# EAGLE board RedBot Accelerometer-Panel-v11 (EAGLE 6.5.0), part 1 of 3
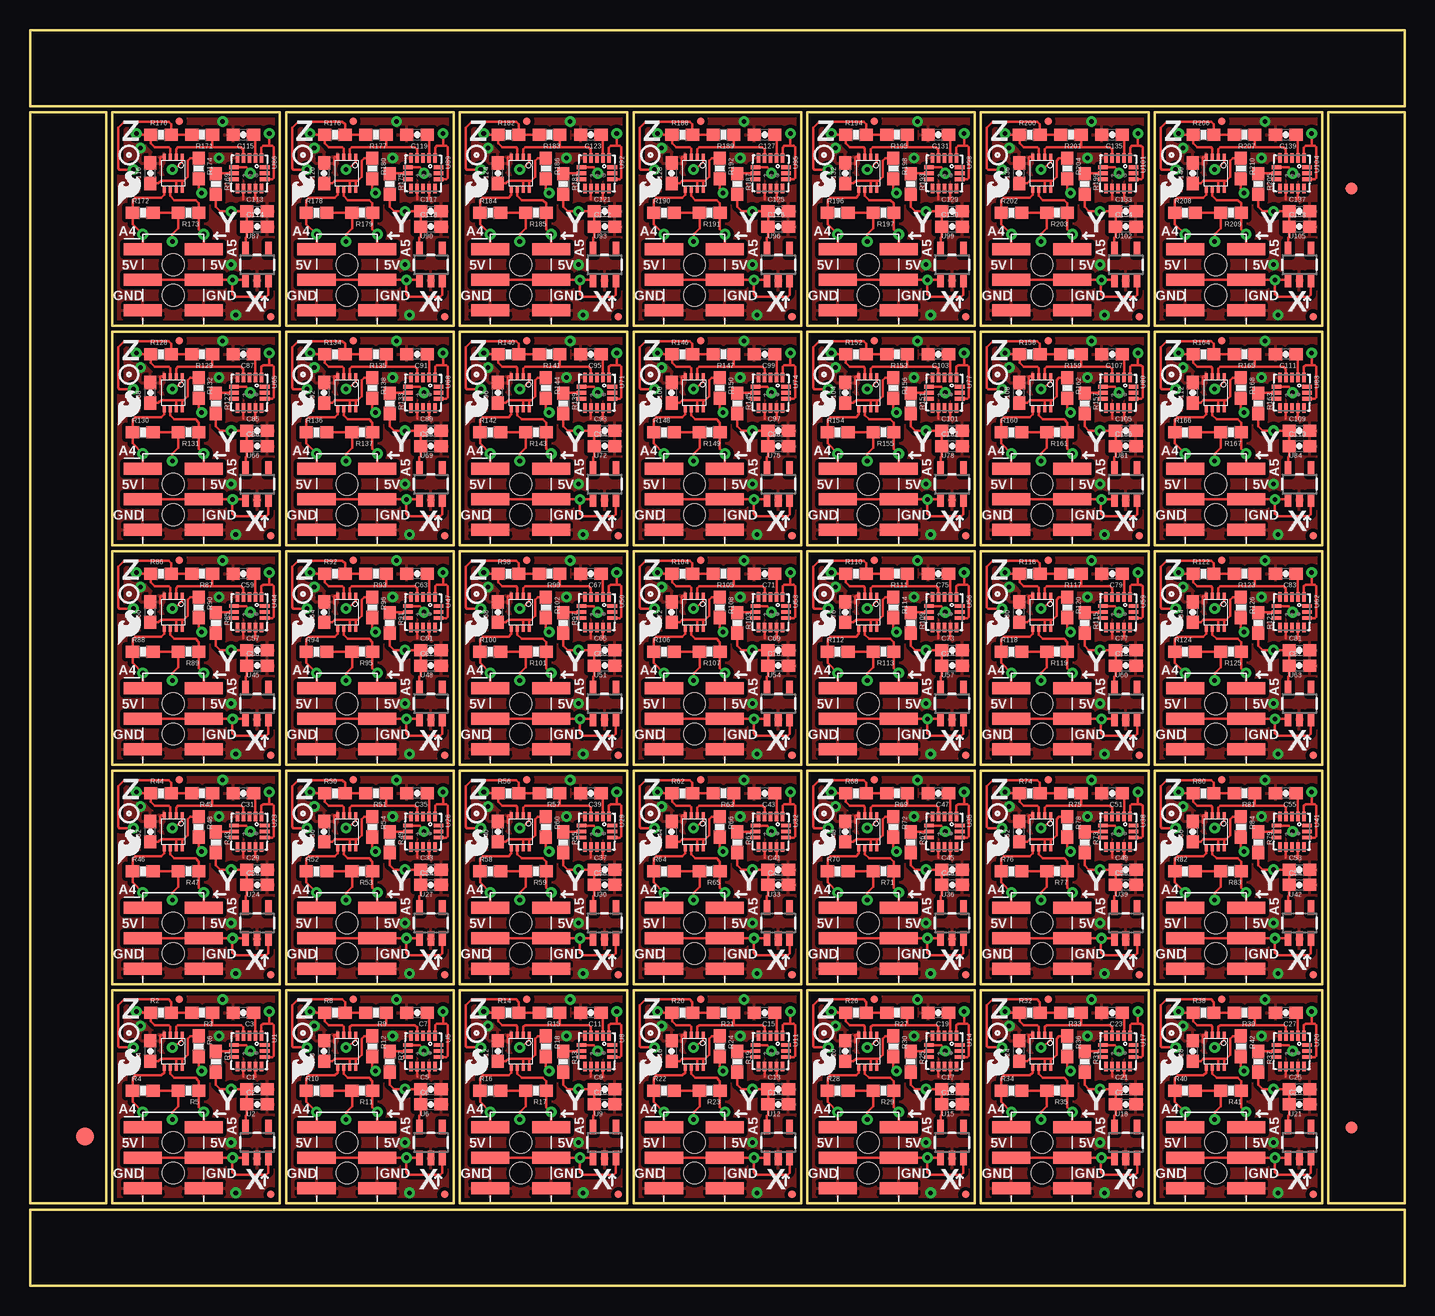
[diagram p0: board, top side]
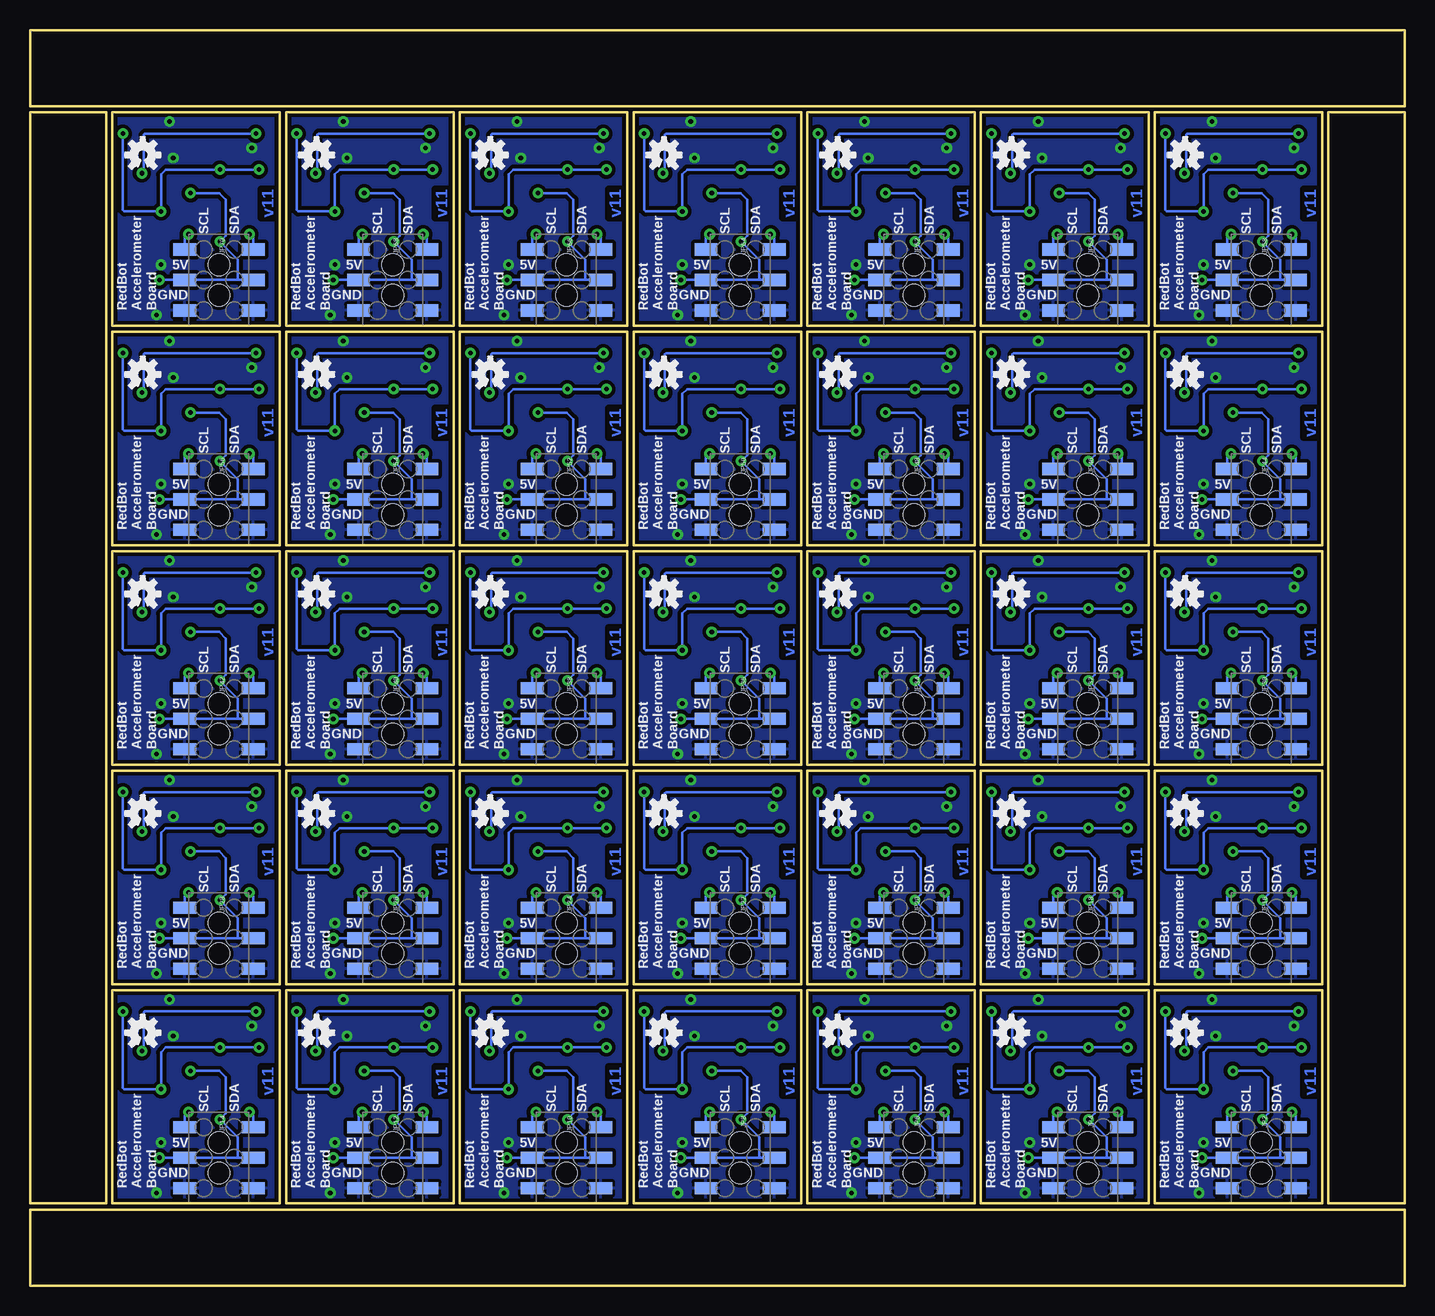
[diagram p1: board, bottom side, seen from below]

Size 114.55 x 104.65 mm. Coordinates in mm from the lower left corner, seen from the top.
Outline: 6.35,79.25 6.35,6.86 0,6.86 0,29.72
Outline: 114.55,79.25 114.55,6.86 108.2,6.86 108.2,29.72
Outline: 108.2,25.4 108.2,97.79 114.55,97.79 114.55,74.93
Outline: 0,25.4 0,97.79 6.35,97.79 6.35,74.93
Outline: 6.86,6.86 6.86,24.64 20.83,24.64 20.83,6.86 6.86,6.86
Outline: 21.34,6.86 21.34,24.64 35.31,24.64 35.31,6.86 21.34,6.86
Outline: 35.81,6.86 35.81,24.64 49.78,24.64 49.78,6.86 35.81,6.86
Outline: 50.29,6.86 50.29,24.64 64.26,24.64 64.26,6.86 50.29,6.86
Outline: 64.77,6.86 64.77,24.64 78.74,24.64 78.74,6.86 64.77,6.86
Outline: 79.25,6.86 79.25,24.64 93.22,24.64 93.22,6.86 79.25,6.86
Outline: 93.73,6.86 93.73,24.64 107.7,24.64 107.7,6.86 93.73,6.86
Outline: 6.86,25.15 6.86,42.93 20.83,42.93 20.83,25.15 6.86,25.15
Outline: 21.34,25.15 21.34,42.93 35.31,42.93 35.31,25.15 21.34,25.15
Outline: 35.81,25.15 35.81,42.93 49.78,42.93 49.78,25.15 35.81,25.15
Outline: 50.29,25.15 50.29,42.93 64.26,42.93 64.26,25.15 50.29,25.15
Outline: 64.77,25.15 64.77,42.93 78.74,42.93 78.74,25.15 64.77,25.15
Outline: 79.25,25.15 79.25,42.93 93.22,42.93 93.22,25.15 79.25,25.15
Outline: 93.73,25.15 93.73,42.93 107.7,42.93 107.7,25.15 93.73,25.15
Outline: 6.86,43.43 6.86,61.21 20.83,61.21 20.83,43.43 6.86,43.43
Outline: 21.34,43.43 21.34,61.21 35.31,61.21 35.31,43.43 21.34,43.43
Outline: 35.81,43.43 35.81,61.21 49.78,61.21 49.78,43.43 35.81,43.43
Outline: 50.29,43.43 50.29,61.21 64.26,61.21 64.26,43.43 50.29,43.43
Outline: 64.77,43.43 64.77,61.21 78.74,61.21 78.74,43.43 64.77,43.43
Outline: 79.25,43.43 79.25,61.21 93.22,61.21 93.22,43.43 79.25,43.43
Outline: 93.73,43.43 93.73,61.21 107.7,61.21 107.7,43.43 93.73,43.43
Outline: 6.86,61.72 6.86,79.5 20.83,79.5 20.83,61.72 6.86,61.72
Outline: 21.34,61.72 21.34,79.5 35.31,79.5 35.31,61.72 21.34,61.72
Outline: 35.81,61.72 35.81,79.5 49.78,79.5 49.78,61.72 35.81,61.72
Outline: 50.29,61.72 50.29,79.5 64.26,79.5 64.26,61.72 50.29,61.72
Outline: 64.77,61.72 64.77,79.5 78.74,79.5 78.74,61.72 64.77,61.72
Outline: 79.25,61.72 79.25,79.5 93.22,79.5 93.22,61.72 79.25,61.72
Outline: 93.73,61.72 93.73,79.5 107.7,79.5 107.7,61.72 93.73,61.72
Outline: 6.86,80.01 6.86,97.79 20.83,97.79 20.83,80.01 6.86,80.01
Outline: 21.34,80.01 21.34,97.79 35.31,97.79 35.31,80.01 21.34,80.01
Outline: 35.81,80.01 35.81,97.79 49.78,97.79 49.78,80.01 35.81,80.01
Outline: 50.29,80.01 50.29,97.79 64.26,97.79 64.26,80.01 50.29,80.01
Outline: 64.77,80.01 64.77,97.79 78.74,97.79 78.74,80.01 64.77,80.01
Outline: 79.25,80.01 79.25,97.79 93.22,97.79 93.22,80.01 79.25,80.01
Outline: 93.73,80.01 93.73,97.79 107.7,97.79 107.7,80.01 93.73,80.01
Outline: 0,0 114.55,0 114.55,6.35 0,6.35 0,0
Outline: 114.55,104.65 0,104.65 0,98.3 114.55,98.3 114.55,104.65
Copper layers (1*16): Top 0.035mm / dielectric 1.5mm / Bottom 0.035mm
Design rules "Sparkfun": minimum track width 8mil, minimum drill 20mil, track to track 8mil, track to pad 8mil, pad to pad 8mil, via to via 8mil, smd to smd 8mil, copper to edge 8mil, drill to drill 8mil, minimum pad ring 12mil, minimum via ring 10mil, stop-mask expansion 4mil, vias tented up to drill 20mil, thermal gap 10mil

## Footprints (pad centres in the part's own frame; a part is rotated, then mirrored left to right if it is on the bottom)
0603-CAP = smd 1.1 x 1: 1 -0.85,0; 2 0.85,0
FIDUCIAL-1.5X3 = smd 1.5 x 1.5: 1 0,0
FIDUCIAL-1X2 = smd 1 x 1: 1 0,0
MICRO-FIDUCIAL = smd 0.635 x 0.635: 1 0,0
2X3_SMT_POSTS = smd 1 x 3.17: 1 -2.54,-2.54; 2 -2.54,2.54; 3 0,-2.54; 4 0,2.54; 5 2.54,-2.54; 6 2.54,2.54 | hole 1.8: -1.27,0; 1.27,0
2X3_SMD = smd 1.02 x 1.9: 1 -2.54,-2.85; 2 -2.54,2.85; 3 0,-2.85; 4 0,2.85; 5 2.54,-2.85; 6 2.54,2.85
0603-RES = smd 1.1 x 1: 1 -0.85,0; 2 0.85,0
QFN-16_0.5MM = smd 0.8 x 0.3: 1 -1.275,1; 2 -1.275,0.5; 3 -1.275,0; 4 -1.275,-0.5; 5 -1.275,-1; 9 1.275,-1; 10 1.275,-0.5; 11 1.275,0; 12 1.275,0.5; 13 1.275,1 | smd 0.3 x 0.8: 6 -0.5,-1.275; 7 0,-1.275; 8 0.5,-1.275; 14 0.5,1.275; 15 0,1.275; 16 -0.5,1.275
SOT23-5 = smd 0.55 x 1.2: 1 -0.95,-1.3; 2 0,-1.3; 3 0.95,-1.3; 4 0.95,1.3; 5 -0.95,1.3
PSOP-8 = smd 0.25 x 0.5: 1 -0.73,-1.37; 2 -0.23,-1.37; 3 0.27,-1.37; 4 0.77,-1.37; 5 0.77,1.38; 6 0.27,1.38; 7 -0.23,1.38; 8 -0.73,1.38

## Placement (x,y rotation side)
C1  0.1uF  [0603-CAP]  18.92,16.38 0 top
C2  4.7uF  [0603-CAP]  18.92,15.11 0 top
C3  0.1uF  [0603-CAP]  17.78,22.76 180 top
C4  0.1uF  [0603-CAP]  10.03,19.56 90 top
C5  0.1uF  [0603-CAP]  33.4,16.38 0 top
C6  4.7uF  [0603-CAP]  33.4,15.11 0 top
C7  0.1uF  [0603-CAP]  32.26,22.76 180 top
C8  0.1uF  [0603-CAP]  24.51,19.56 90 top
C9  0.1uF  [0603-CAP]  47.88,16.38 0 top
C10  4.7uF  [0603-CAP]  47.88,15.11 0 top
C11  0.1uF  [0603-CAP]  46.74,22.76 180 top
C12  0.1uF  [0603-CAP]  38.99,19.56 90 top
C13  0.1uF  [0603-CAP]  62.36,16.38 0 top
C14  4.7uF  [0603-CAP]  62.36,15.11 0 top
C15  0.1uF  [0603-CAP]  61.21,22.76 180 top
C16  0.1uF  [0603-CAP]  53.47,19.56 90 top
C17  0.1uF  [0603-CAP]  76.83,16.38 0 top
C18  4.7uF  [0603-CAP]  76.83,15.11 0 top
C19  0.1uF  [0603-CAP]  75.69,22.76 180 top
C20  0.1uF  [0603-CAP]  67.94,19.56 90 top
C21  0.1uF  [0603-CAP]  91.31,16.38 0 top
C22  4.7uF  [0603-CAP]  91.31,15.11 0 top
C23  0.1uF  [0603-CAP]  90.17,22.76 180 top
C24  0.1uF  [0603-CAP]  82.42,19.56 90 top
C25  0.1uF  [0603-CAP]  105.79,16.38 0 top
C26  4.7uF  [0603-CAP]  105.79,15.11 0 top
C27  0.1uF  [0603-CAP]  104.65,22.76 180 top
C28  0.1uF  [0603-CAP]  96.9,19.56 90 top
C29  0.1uF  [0603-CAP]  18.92,34.67 0 top
C30  4.7uF  [0603-CAP]  18.92,33.4 0 top
C31  0.1uF  [0603-CAP]  17.78,41.05 180 top
C32  0.1uF  [0603-CAP]  10.03,37.85 90 top
C33  0.1uF  [0603-CAP]  33.4,34.67 0 top
C34  4.7uF  [0603-CAP]  33.4,33.4 0 top
C35  0.1uF  [0603-CAP]  32.26,41.05 180 top
C36  0.1uF  [0603-CAP]  24.51,37.85 90 top
C37  0.1uF  [0603-CAP]  47.88,34.67 0 top
C38  4.7uF  [0603-CAP]  47.88,33.4 0 top
C39  0.1uF  [0603-CAP]  46.74,41.05 180 top
C40  0.1uF  [0603-CAP]  38.99,37.85 90 top
C41  0.1uF  [0603-CAP]  62.36,34.67 0 top
C42  4.7uF  [0603-CAP]  62.36,33.4 0 top
C43  0.1uF  [0603-CAP]  61.21,41.05 180 top
C44  0.1uF  [0603-CAP]  53.47,37.85 90 top
C45  0.1uF  [0603-CAP]  76.83,34.67 0 top
C46  4.7uF  [0603-CAP]  76.83,33.4 0 top
C47  0.1uF  [0603-CAP]  75.69,41.05 180 top
C48  0.1uF  [0603-CAP]  67.94,37.85 90 top
C49  0.1uF  [0603-CAP]  91.31,34.67 0 top
C50  4.7uF  [0603-CAP]  91.31,33.4 0 top
C51  0.1uF  [0603-CAP]  90.17,41.05 180 top
C52  0.1uF  [0603-CAP]  82.42,37.85 90 top
C53  0.1uF  [0603-CAP]  105.79,34.67 0 top
C54  4.7uF  [0603-CAP]  105.79,33.4 0 top
C55  0.1uF  [0603-CAP]  104.65,41.05 180 top
C56  0.1uF  [0603-CAP]  96.9,37.85 90 top
C57  0.1uF  [0603-CAP]  18.92,52.96 0 top
C58  4.7uF  [0603-CAP]  18.92,51.69 0 top
C59  0.1uF  [0603-CAP]  17.78,59.34 180 top
C60  0.1uF  [0603-CAP]  10.03,56.13 90 top
C61  0.1uF  [0603-CAP]  33.4,52.96 0 top
C62  4.7uF  [0603-CAP]  33.4,51.69 0 top
C63  0.1uF  [0603-CAP]  32.26,59.34 180 top
C64  0.1uF  [0603-CAP]  24.51,56.13 90 top
C65  0.1uF  [0603-CAP]  47.88,52.96 0 top
C66  4.7uF  [0603-CAP]  47.88,51.69 0 top
C67  0.1uF  [0603-CAP]  46.74,59.34 180 top
C68  0.1uF  [0603-CAP]  38.99,56.13 90 top
C69  0.1uF  [0603-CAP]  62.36,52.96 0 top
C70  4.7uF  [0603-CAP]  62.36,51.69 0 top
C71  0.1uF  [0603-CAP]  61.21,59.34 180 top
C72  0.1uF  [0603-CAP]  53.47,56.13 90 top
C73  0.1uF  [0603-CAP]  76.83,52.96 0 top
C74  4.7uF  [0603-CAP]  76.83,51.69 0 top
C75  0.1uF  [0603-CAP]  75.69,59.34 180 top
C76  0.1uF  [0603-CAP]  67.94,56.13 90 top
C77  0.1uF  [0603-CAP]  91.31,52.96 0 top
C78  4.7uF  [0603-CAP]  91.31,51.69 0 top
C79  0.1uF  [0603-CAP]  90.17,59.34 180 top
C80  0.1uF  [0603-CAP]  82.42,56.13 90 top
C81  0.1uF  [0603-CAP]  105.79,52.96 0 top
C82  4.7uF  [0603-CAP]  105.79,51.69 0 top
C83  0.1uF  [0603-CAP]  104.65,59.34 180 top
C84  0.1uF  [0603-CAP]  96.9,56.13 90 top
C85  0.1uF  [0603-CAP]  18.92,71.25 0 top
C86  4.7uF  [0603-CAP]  18.92,69.98 0 top
C87  0.1uF  [0603-CAP]  17.78,77.62 180 top
C88  0.1uF  [0603-CAP]  10.03,74.42 90 top
C89  0.1uF  [0603-CAP]  33.4,71.25 0 top
C90  4.7uF  [0603-CAP]  33.4,69.98 0 top
C91  0.1uF  [0603-CAP]  32.26,77.62 180 top
C92  0.1uF  [0603-CAP]  24.51,74.42 90 top
C93  0.1uF  [0603-CAP]  47.88,71.25 0 top
C94  4.7uF  [0603-CAP]  47.88,69.98 0 top
C95  0.1uF  [0603-CAP]  46.74,77.62 180 top
C96  0.1uF  [0603-CAP]  38.99,74.42 90 top
C97  0.1uF  [0603-CAP]  62.36,71.25 0 top
C98  4.7uF  [0603-CAP]  62.36,69.98 0 top
C99  0.1uF  [0603-CAP]  61.21,77.62 180 top
C100  0.1uF  [0603-CAP]  53.47,74.42 90 top
C101  0.1uF  [0603-CAP]  76.83,71.25 0 top
C102  4.7uF  [0603-CAP]  76.83,69.98 0 top
C103  0.1uF  [0603-CAP]  75.69,77.62 180 top
C104  0.1uF  [0603-CAP]  67.94,74.42 90 top
C105  0.1uF  [0603-CAP]  91.31,71.25 0 top
C106  4.7uF  [0603-CAP]  91.31,69.98 0 top
C107  0.1uF  [0603-CAP]  90.17,77.62 180 top
C108  0.1uF  [0603-CAP]  82.42,74.42 90 top
C109  0.1uF  [0603-CAP]  105.79,71.25 0 top
C110  4.7uF  [0603-CAP]  105.79,69.98 0 top
C111  0.1uF  [0603-CAP]  104.65,77.62 180 top
C112  0.1uF  [0603-CAP]  96.9,74.42 90 top
C113  0.1uF  [0603-CAP]  18.92,89.53 0 top
C114  4.7uF  [0603-CAP]  18.92,88.27 0 top
C115  0.1uF  [0603-CAP]  17.78,95.91 180 top
C116  0.1uF  [0603-CAP]  10.03,92.71 90 top
C117  0.1uF  [0603-CAP]  33.4,89.53 0 top
C118  4.7uF  [0603-CAP]  33.4,88.27 0 top
C119  0.1uF  [0603-CAP]  32.26,95.91 180 top
C120  0.1uF  [0603-CAP]  24.51,92.71 90 top
C121  0.1uF  [0603-CAP]  47.88,89.53 0 top
C122  4.7uF  [0603-CAP]  47.88,88.27 0 top
C123  0.1uF  [0603-CAP]  46.74,95.91 180 top
C124  0.1uF  [0603-CAP]  38.99,92.71 90 top
C125  0.1uF  [0603-CAP]  62.36,89.53 0 top
C126  4.7uF  [0603-CAP]  62.36,88.27 0 top
C127  0.1uF  [0603-CAP]  61.21,95.91 180 top
C128  0.1uF  [0603-CAP]  53.47,92.71 90 top
C129  0.1uF  [0603-CAP]  76.83,89.53 0 top
C130  4.7uF  [0603-CAP]  76.83,88.27 0 top
C131  0.1uF  [0603-CAP]  75.69,95.91 180 top
C132  0.1uF  [0603-CAP]  67.94,92.71 90 top
C133  0.1uF  [0603-CAP]  91.31,89.53 0 top
C134  4.7uF  [0603-CAP]  91.31,88.27 0 top
C135  0.1uF  [0603-CAP]  90.17,95.91 180 top
C136  0.1uF  [0603-CAP]  82.42,92.71 90 top
C137  0.1uF  [0603-CAP]  105.79,89.53 0 top
C138  4.7uF  [0603-CAP]  105.79,88.27 0 top
C139  0.1uF  [0603-CAP]  104.65,95.91 180 top
C140  0.1uF  [0603-CAP]  96.9,92.71 90 top
E$1  [FIDUCIAL-1.5X3]  4.57,12.45 0 top
E$4  [FIDUCIAL-1X2]  110.11,13.21 0 top
E$5  [FIDUCIAL-1X2]  110.11,91.44 180 top
FID1  FIDUCIALUFIDUCIAL  [MICRO-FIDUCIAL]  20.07,7.62 0 top
FID2  FIDUCIALUFIDUCIAL  [MICRO-FIDUCIAL]  12.45,23.88 0 top
FID3  FIDUCIALUFIDUCIAL  [MICRO-FIDUCIAL]  34.54,7.62 0 top
FID4  FIDUCIALUFIDUCIAL  [MICRO-FIDUCIAL]  26.92,23.88 0 top
FID5  FIDUCIALUFIDUCIAL  [MICRO-FIDUCIAL]  49.02,7.62 0 top
FID6  FIDUCIALUFIDUCIAL  [MICRO-FIDUCIAL]  41.4,23.88 0 top
FID7  FIDUCIALUFIDUCIAL  [MICRO-FIDUCIAL]  63.5,7.62 0 top
FID8  FIDUCIALUFIDUCIAL  [MICRO-FIDUCIAL]  55.88,23.88 0 top
FID9  FIDUCIALUFIDUCIAL  [MICRO-FIDUCIAL]  77.98,7.62 0 top
FID10  FIDUCIALUFIDUCIAL  [MICRO-FIDUCIAL]  70.36,23.88 0 top
FID11  FIDUCIALUFIDUCIAL  [MICRO-FIDUCIAL]  92.46,7.62 0 top
FID12  FIDUCIALUFIDUCIAL  [MICRO-FIDUCIAL]  84.84,23.88 0 top
FID13  FIDUCIALUFIDUCIAL  [MICRO-FIDUCIAL]  106.93,7.62 0 top
FID14  FIDUCIALUFIDUCIAL  [MICRO-FIDUCIAL]  99.31,23.88 0 top
FID15  FIDUCIALUFIDUCIAL  [MICRO-FIDUCIAL]  20.07,25.91 0 top
FID16  FIDUCIALUFIDUCIAL  [MICRO-FIDUCIAL]  12.45,42.16 0 top
FID17  FIDUCIALUFIDUCIAL  [MICRO-FIDUCIAL]  34.54,25.91 0 top
FID18  FIDUCIALUFIDUCIAL  [MICRO-FIDUCIAL]  26.92,42.16 0 top
FID19  FIDUCIALUFIDUCIAL  [MICRO-FIDUCIAL]  49.02,25.91 0 top
FID20  FIDUCIALUFIDUCIAL  [MICRO-FIDUCIAL]  41.4,42.16 0 top
FID21  FIDUCIALUFIDUCIAL  [MICRO-FIDUCIAL]  63.5,25.91 0 top
FID22  FIDUCIALUFIDUCIAL  [MICRO-FIDUCIAL]  55.88,42.16 0 top
FID23  FIDUCIALUFIDUCIAL  [MICRO-FIDUCIAL]  77.98,25.91 0 top
FID24  FIDUCIALUFIDUCIAL  [MICRO-FIDUCIAL]  70.36,42.16 0 top
FID25  FIDUCIALUFIDUCIAL  [MICRO-FIDUCIAL]  92.46,25.91 0 top
FID26  FIDUCIALUFIDUCIAL  [MICRO-FIDUCIAL]  84.84,42.16 0 top
FID27  FIDUCIALUFIDUCIAL  [MICRO-FIDUCIAL]  106.93,25.91 0 top
FID28  FIDUCIALUFIDUCIAL  [MICRO-FIDUCIAL]  99.31,42.16 0 top
FID29  FIDUCIALUFIDUCIAL  [MICRO-FIDUCIAL]  20.07,44.2 0 top
FID30  FIDUCIALUFIDUCIAL  [MICRO-FIDUCIAL]  12.45,60.45 0 top
FID31  FIDUCIALUFIDUCIAL  [MICRO-FIDUCIAL]  34.54,44.2 0 top
FID32  FIDUCIALUFIDUCIAL  [MICRO-FIDUCIAL]  26.92,60.45 0 top
FID33  FIDUCIALUFIDUCIAL  [MICRO-FIDUCIAL]  49.02,44.2 0 top
FID34  FIDUCIALUFIDUCIAL  [MICRO-FIDUCIAL]  41.4,60.45 0 top
FID35  FIDUCIALUFIDUCIAL  [MICRO-FIDUCIAL]  63.5,44.2 0 top
FID36  FIDUCIALUFIDUCIAL  [MICRO-FIDUCIAL]  55.88,60.45 0 top
FID37  FIDUCIALUFIDUCIAL  [MICRO-FIDUCIAL]  77.98,44.2 0 top
FID38  FIDUCIALUFIDUCIAL  [MICRO-FIDUCIAL]  70.36,60.45 0 top
FID39  FIDUCIALUFIDUCIAL  [MICRO-FIDUCIAL]  92.46,44.2 0 top
FID40  FIDUCIALUFIDUCIAL  [MICRO-FIDUCIAL]  84.84,60.45 0 top
FID41  FIDUCIALUFIDUCIAL  [MICRO-FIDUCIAL]  106.93,44.2 0 top
FID42  FIDUCIALUFIDUCIAL  [MICRO-FIDUCIAL]  99.31,60.45 0 top
FID43  FIDUCIALUFIDUCIAL  [MICRO-FIDUCIAL]  20.07,62.48 0 top
FID44  FIDUCIALUFIDUCIAL  [MICRO-FIDUCIAL]  12.45,78.74 0 top
FID45  FIDUCIALUFIDUCIAL  [MICRO-FIDUCIAL]  34.54,62.48 0 top
FID46  FIDUCIALUFIDUCIAL  [MICRO-FIDUCIAL]  26.92,78.74 0 top
FID47  FIDUCIALUFIDUCIAL  [MICRO-FIDUCIAL]  49.02,62.48 0 top
FID48  FIDUCIALUFIDUCIAL  [MICRO-FIDUCIAL]  41.4,78.74 0 top
FID49  FIDUCIALUFIDUCIAL  [MICRO-FIDUCIAL]  63.5,62.48 0 top
FID50  FIDUCIALUFIDUCIAL  [MICRO-FIDUCIAL]  55.88,78.74 0 top
FID51  FIDUCIALUFIDUCIAL  [MICRO-FIDUCIAL]  77.98,62.48 0 top
FID52  FIDUCIALUFIDUCIAL  [MICRO-FIDUCIAL]  70.36,78.74 0 top
FID53  FIDUCIALUFIDUCIAL  [MICRO-FIDUCIAL]  92.46,62.48 0 top
FID54  FIDUCIALUFIDUCIAL  [MICRO-FIDUCIAL]  84.84,78.74 0 top
FID55  FIDUCIALUFIDUCIAL  [MICRO-FIDUCIAL]  106.93,62.48 0 top
FID56  FIDUCIALUFIDUCIAL  [MICRO-FIDUCIAL]  99.31,78.74 0 top
FID57  FIDUCIALUFIDUCIAL  [MICRO-FIDUCIAL]  20.07,80.77 0 top
FID58  FIDUCIALUFIDUCIAL  [MICRO-FIDUCIAL]  12.45,97.03 0 top
FID59  FIDUCIALUFIDUCIAL  [MICRO-FIDUCIAL]  34.54,80.77 0 top
FID60  FIDUCIALUFIDUCIAL  [MICRO-FIDUCIAL]  26.92,97.03 0 top
FID61  FIDUCIALUFIDUCIAL  [MICRO-FIDUCIAL]  49.02,80.77 0 top
FID62  FIDUCIALUFIDUCIAL  [MICRO-FIDUCIAL]  41.4,97.03 0 top
FID63  FIDUCIALUFIDUCIAL  [MICRO-FIDUCIAL]  63.5,80.77 0 top
FID64  FIDUCIALUFIDUCIAL  [MICRO-FIDUCIAL]  55.88,97.03 0 top
FID65  FIDUCIALUFIDUCIAL  [MICRO-FIDUCIAL]  77.98,80.77 0 top
FID66  FIDUCIALUFIDUCIAL  [MICRO-FIDUCIAL]  70.36,97.03 0 top
FID67  FIDUCIALUFIDUCIAL  [MICRO-FIDUCIAL]  92.46,80.77 0 top
FID68  FIDUCIALUFIDUCIAL  [MICRO-FIDUCIAL]  84.84,97.03 0 top
FID69  FIDUCIALUFIDUCIAL  [MICRO-FIDUCIAL]  106.93,80.77 0 top
FID70  FIDUCIALUFIDUCIAL  [MICRO-FIDUCIAL]  99.31,97.03 0 top
JP1  [2X3_SMT_POSTS]  11.94,10.67 270 top
JP2  [2X3_SMD]  11.94,10.67 270 bottom
JP3  [2X3_SMT_POSTS]  26.42,10.67 270 top
JP4  [2X3_SMD]  26.42,10.67 270 bottom
JP5  [2X3_SMT_POSTS]  40.89,10.67 270 top
JP6  [2X3_SMD]  40.89,10.67 270 bottom
JP7  [2X3_SMT_POSTS]  55.37,10.67 270 top
JP8  [2X3_SMD]  55.37,10.67 270 bottom
JP9  [2X3_SMT_POSTS]  69.85,10.67 270 top
JP10  [2X3_SMD]  69.85,10.67 270 bottom
JP11  [2X3_SMT_POSTS]  84.33,10.67 270 top
JP12  [2X3_SMD]  84.33,10.67 270 bottom
JP13  [2X3_SMT_POSTS]  98.81,10.67 270 top
JP14  [2X3_SMD]  98.81,10.67 270 bottom
JP15  [2X3_SMT_POSTS]  11.94,28.96 270 top
JP16  [2X3_SMD]  11.94,28.96 270 bottom
JP17  [2X3_SMT_POSTS]  26.42,28.96 270 top
JP18  [2X3_SMD]  26.42,28.96 270 bottom
JP19  [2X3_SMT_POSTS]  40.89,28.96 270 top
JP20  [2X3_SMD]  40.89,28.96 270 bottom
JP21  [2X3_SMT_POSTS]  55.37,28.96 270 top
JP22  [2X3_SMD]  55.37,28.96 270 bottom
JP23  [2X3_SMT_POSTS]  69.85,28.96 270 top
JP24  [2X3_SMD]  69.85,28.96 270 bottom
JP25  [2X3_SMT_POSTS]  84.33,28.96 270 top
JP26  [2X3_SMD]  84.33,28.96 270 bottom
JP27  [2X3_SMT_POSTS]  98.81,28.96 270 top
JP28  [2X3_SMD]  98.81,28.96 270 bottom
JP29  [2X3_SMT_POSTS]  11.94,47.24 270 top
JP30  [2X3_SMD]  11.94,47.24 270 bottom
JP31  [2X3_SMT_POSTS]  26.42,47.24 270 top
JP32  [2X3_SMD]  26.42,47.24 270 bottom
JP33  [2X3_SMT_POSTS]  40.89,47.24 270 top
JP34  [2X3_SMD]  40.89,47.24 270 bottom
JP35  [2X3_SMT_POSTS]  55.37,47.24 270 top
JP36  [2X3_SMD]  55.37,47.24 270 bottom
JP37  [2X3_SMT_POSTS]  69.85,47.24 270 top
JP38  [2X3_SMD]  69.85,47.24 270 bottom
JP39  [2X3_SMT_POSTS]  84.33,47.24 270 top
JP40  [2X3_SMD]  84.33,47.24 270 bottom
JP41  [2X3_SMT_POSTS]  98.81,47.24 270 top
JP42  [2X3_SMD]  98.81,47.24 270 bottom
JP43  [2X3_SMT_POSTS]  11.94,65.53 270 top
JP44  [2X3_SMD]  11.94,65.53 270 bottom
JP45  [2X3_SMT_POSTS]  26.42,65.53 270 top
JP46  [2X3_SMD]  26.42,65.53 270 bottom
JP47  [2X3_SMT_POSTS]  40.89,65.53 270 top
JP48  [2X3_SMD]  40.89,65.53 270 bottom
JP49  [2X3_SMT_POSTS]  55.37,65.53 270 top
JP50  [2X3_SMD]  55.37,65.53 270 bottom
JP51  [2X3_SMT_POSTS]  69.85,65.53 270 top
JP52  [2X3_SMD]  69.85,65.53 270 bottom
JP53  [2X3_SMT_POSTS]  84.33,65.53 270 top
JP54  [2X3_SMD]  84.33,65.53 270 bottom
JP55  [2X3_SMT_POSTS]  98.81,65.53 270 top
JP56  [2X3_SMD]  98.81,65.53 270 bottom
JP57  [2X3_SMT_POSTS]  11.94,83.82 270 top
JP58  [2X3_SMD]  11.94,83.82 270 bottom
JP59  [2X3_SMT_POSTS]  26.42,83.82 270 top
JP60  [2X3_SMD]  26.42,83.82 270 bottom
JP61  [2X3_SMT_POSTS]  40.89,83.82 270 top
JP62  [2X3_SMD]  40.89,83.82 270 bottom
JP63  [2X3_SMT_POSTS]  55.37,83.82 270 top
JP64  [2X3_SMD]  55.37,83.82 270 bottom
JP65  [2X3_SMT_POSTS]  69.85,83.82 270 top
JP66  [2X3_SMD]  69.85,83.82 270 bottom
JP67  [2X3_SMT_POSTS]  84.33,83.82 270 top
JP68  [2X3_SMD]  84.33,83.82 270 bottom
JP69  [2X3_SMT_POSTS]  98.81,83.82 270 top
JP70  [2X3_SMD]  98.81,83.82 270 bottom
LOGO1  LOGO-SFESK  [SFE-LOGO-FLAME]  7.37,16.89 0 top
LOGO2  OSHW-LOGOS  [OSHW-LOGO-S]  18.29,21.08 0 bottom
LOGO3  LOGO-SFESK  [SFE-LOGO-FLAME]  21.84,16.89 0 top
LOGO4  OSHW-LOGOS  [OSHW-LOGO-S]  32.77,21.08 0 bottom
LOGO5  LOGO-SFESK  [SFE-LOGO-FLAME]  36.32,16.89 0 top
LOGO6  OSHW-LOGOS  [OSHW-LOGO-S]  47.24,21.08 0 bottom
LOGO7  LOGO-SFESK  [SFE-LOGO-FLAME]  50.8,16.89 0 top
LOGO8  OSHW-LOGOS  [OSHW-LOGO-S]  61.72,21.08 0 bottom
LOGO9  LOGO-SFESK  [SFE-LOGO-FLAME]  65.28,16.89 0 top
LOGO10  OSHW-LOGOS  [OSHW-LOGO-S]  76.2,21.08 0 bottom
LOGO11  LOGO-SFESK  [SFE-LOGO-FLAME]  79.76,16.89 0 top
LOGO12  OSHW-LOGOS  [OSHW-LOGO-S]  90.68,21.08 0 bottom
LOGO13  LOGO-SFESK  [SFE-LOGO-FLAME]  94.23,16.89 0 top
LOGO14  OSHW-LOGOS  [OSHW-LOGO-S]  105.16,21.08 0 bottom
LOGO15  LOGO-SFESK  [SFE-LOGO-FLAME]  7.37,35.18 0 top
LOGO16  OSHW-LOGOS  [OSHW-LOGO-S]  18.29,39.37 0 bottom
LOGO17  LOGO-SFESK  [SFE-LOGO-FLAME]  21.84,35.18 0 top
LOGO18  OSHW-LOGOS  [OSHW-LOGO-S]  32.77,39.37 0 bottom
LOGO19  LOGO-SFESK  [SFE-LOGO-FLAME]  36.32,35.18 0 top
LOGO20  OSHW-LOGOS  [OSHW-LOGO-S]  47.24,39.37 0 bottom
LOGO21  LOGO-SFESK  [SFE-LOGO-FLAME]  50.8,35.18 0 top
LOGO22  OSHW-LOGOS  [OSHW-LOGO-S]  61.72,39.37 0 bottom
LOGO23  LOGO-SFESK  [SFE-LOGO-FLAME]  65.28,35.18 0 top
LOGO24  OSHW-LOGOS  [OSHW-LOGO-S]  76.2,39.37 0 bottom
LOGO25  LOGO-SFESK  [SFE-LOGO-FLAME]  79.76,35.18 0 top
LOGO26  OSHW-LOGOS  [OSHW-LOGO-S]  90.68,39.37 0 bottom
LOGO27  LOGO-SFESK  [SFE-LOGO-FLAME]  94.23,35.18 0 top
LOGO28  OSHW-LOGOS  [OSHW-LOGO-S]  105.16,39.37 0 bottom
LOGO29  LOGO-SFESK  [SFE-LOGO-FLAME]  7.37,53.47 0 top
LOGO30  OSHW-LOGOS  [OSHW-LOGO-S]  18.29,57.66 0 bottom
LOGO31  LOGO-SFESK  [SFE-LOGO-FLAME]  21.84,53.47 0 top
LOGO32  OSHW-LOGOS  [OSHW-LOGO-S]  32.77,57.66 0 bottom
LOGO33  LOGO-SFESK  [SFE-LOGO-FLAME]  36.32,53.47 0 top
LOGO34  OSHW-LOGOS  [OSHW-LOGO-S]  47.24,57.66 0 bottom
LOGO35  LOGO-SFESK  [SFE-LOGO-FLAME]  50.8,53.47 0 top
LOGO36  OSHW-LOGOS  [OSHW-LOGO-S]  61.72,57.66 0 bottom
LOGO37  LOGO-SFESK  [SFE-LOGO-FLAME]  65.28,53.47 0 top
LOGO38  OSHW-LOGOS  [OSHW-LOGO-S]  76.2,57.66 0 bottom
LOGO39  LOGO-SFESK  [SFE-LOGO-FLAME]  79.76,53.47 0 top
LOGO40  OSHW-LOGOS  [OSHW-LOGO-S]  90.68,57.66 0 bottom
LOGO41  LOGO-SFESK  [SFE-LOGO-FLAME]  94.23,53.47 0 top
LOGO42  OSHW-LOGOS  [OSHW-LOGO-S]  105.16,57.66 0 bottom
LOGO43  LOGO-SFESK  [SFE-LOGO-FLAME]  7.37,71.75 0 top
LOGO44  OSHW-LOGOS  [OSHW-LOGO-S]  18.29,75.95 0 bottom
LOGO45  LOGO-SFESK  [SFE-LOGO-FLAME]  21.84,71.75 0 top
LOGO46  OSHW-LOGOS  [OSHW-LOGO-S]  32.77,75.95 0 bottom
LOGO47  LOGO-SFESK  [SFE-LOGO-FLAME]  36.32,71.75 0 top
LOGO48  OSHW-LOGOS  [OSHW-LOGO-S]  47.24,75.95 0 bottom
LOGO49  LOGO-SFESK  [SFE-LOGO-FLAME]  50.8,71.75 0 top
LOGO50  OSHW-LOGOS  [OSHW-LOGO-S]  61.72,75.95 0 bottom
LOGO51  LOGO-SFESK  [SFE-LOGO-FLAME]  65.28,71.75 0 top
LOGO52  OSHW-LOGOS  [OSHW-LOGO-S]  76.2,75.95 0 bottom
LOGO53  LOGO-SFESK  [SFE-LOGO-FLAME]  79.76,71.75 0 top
LOGO54  OSHW-LOGOS  [OSHW-LOGO-S]  90.68,75.95 0 bottom
LOGO55  LOGO-SFESK  [SFE-LOGO-FLAME]  94.23,71.75 0 top
LOGO56  OSHW-LOGOS  [OSHW-LOGO-S]  105.16,75.95 0 bottom
LOGO57  LOGO-SFESK  [SFE-LOGO-FLAME]  7.37,90.04 0 top
LOGO58  OSHW-LOGOS  [OSHW-LOGO-S]  18.29,94.23 0 bottom
LOGO59  LOGO-SFESK  [SFE-LOGO-FLAME]  21.84,90.04 0 top
LOGO60  OSHW-LOGOS  [OSHW-LOGO-S]  32.77,94.23 0 bottom
LOGO61  LOGO-SFESK  [SFE-LOGO-FLAME]  36.32,90.04 0 top
LOGO62  OSHW-LOGOS  [OSHW-LOGO-S]  47.24,94.23 0 bottom
LOGO63  LOGO-SFESK  [SFE-LOGO-FLAME]  50.8,90.04 0 top
LOGO64  OSHW-LOGOS  [OSHW-LOGO-S]  61.72,94.23 0 bottom
LOGO65  LOGO-SFESK  [SFE-LOGO-FLAME]  65.28,90.04 0 top
LOGO66  OSHW-LOGOS  [OSHW-LOGO-S]  76.2,94.23 0 bottom
LOGO67  LOGO-SFESK  [SFE-LOGO-FLAME]  79.76,90.04 0 top
LOGO68  OSHW-LOGOS  [OSHW-LOGO-S]  90.68,94.23 0 bottom
LOGO69  LOGO-SFESK  [SFE-LOGO-FLAME]  94.23,90.04 0 top
LOGO70  OSHW-LOGOS  [OSHW-LOGO-S]  105.16,94.23 0 bottom
R1  10k  [0603-RES]  15.49,18.67 270 top
R2  1k  [0603-RES]  10.92,22.76 0 top
R3  1k  [0603-RES]  14.35,22.76 180 top
R4  1k  [0603-RES]  9.4,16.26 0 top
R5  1k  [0603-RES]  13.21,16.26 180 top
R6  200k  [0603-RES]  14.04,19.96 270 top
R7  10k  [0603-RES]  29.97,18.67 270 top
R8  1k  [0603-RES]  25.4,22.76 0 top
R9  1k  [0603-RES]  28.83,22.76 180 top
R10  1k  [0603-RES]  23.88,16.26 0 top
R11  1k  [0603-RES]  27.69,16.26 180 top
R12  200k  [0603-RES]  28.52,19.96 270 top
R13  10k  [0603-RES]  44.45,18.67 270 top
R14  1k  [0603-RES]  39.88,22.76 0 top
R15  1k  [0603-RES]  43.31,22.76 180 top
R16  1k  [0603-RES]  38.35,16.26 0 top
R17  1k  [0603-RES]  42.16,16.26 180 top
R18  200k  [0603-RES]  43,19.96 270 top
R19  10k  [0603-RES]  58.93,18.67 270 top
R20  1k  [0603-RES]  54.36,22.76 0 top
R21  1k  [0603-RES]  57.78,22.76 180 top
R22  1k  [0603-RES]  52.83,16.26 0 top
R23  1k  [0603-RES]  56.64,16.26 180 top
R24  200k  [0603-RES]  57.48,19.96 270 top
R25  10k  [0603-RES]  73.41,18.67 270 top
R26  1k  [0603-RES]  68.83,22.76 0 top
R27  1k  [0603-RES]  72.26,22.76 180 top
R28  1k  [0603-RES]  67.31,16.26 0 top
R29  1k  [0603-RES]  71.12,16.26 180 top
R30  200k  [0603-RES]  71.95,19.96 270 top
R31  10k  [0603-RES]  87.88,18.67 270 top
R32  1k  [0603-RES]  83.31,22.76 0 top
R33  1k  [0603-RES]  86.74,22.76 180 top
R34  1k  [0603-RES]  81.79,16.26 0 top
R35  1k  [0603-RES]  85.6,16.26 180 top
R36  200k  [0603-RES]  86.43,19.96 270 top
R37  10k  [0603-RES]  102.36,18.67 270 top
R38  1k  [0603-RES]  97.79,22.76 0 top
R39  1k  [0603-RES]  101.22,22.76 180 top
R40  1k  [0603-RES]  96.27,16.26 0 top
R41  1k  [0603-RES]  100.08,16.26 180 top
R42  200k  [0603-RES]  100.91,19.96 270 top
R43  10k  [0603-RES]  15.49,36.96 270 top
R44  1k  [0603-RES]  10.92,41.05 0 top
R45  1k  [0603-RES]  14.35,41.05 180 top
R46  1k  [0603-RES]  9.4,34.55 0 top
R47  1k  [0603-RES]  13.21,34.55 180 top
R48  200k  [0603-RES]  14.04,38.25 270 top
R49  10k  [0603-RES]  29.97,36.96 270 top
R50  1k  [0603-RES]  25.4,41.05 0 top
R51  1k  [0603-RES]  28.83,41.05 180 top
R52  1k  [0603-RES]  23.88,34.55 0 top
R53  1k  [0603-RES]  27.69,34.55 180 top
R54  200k  [0603-RES]  28.52,38.25 270 top
R55  10k  [0603-RES]  44.45,36.96 270 top
R56  1k  [0603-RES]  39.88,41.05 0 top
R57  1k  [0603-RES]  43.31,41.05 180 top
R58  1k  [0603-RES]  38.35,34.55 0 top
R59  1k  [0603-RES]  42.16,34.55 180 top
R60  200k  [0603-RES]  43,38.25 270 top
R61  10k  [0603-RES]  58.93,36.96 270 top
R62  1k  [0603-RES]  54.36,41.05 0 top
R63  1k  [0603-RES]  57.78,41.05 180 top
R64  1k  [0603-RES]  52.83,34.55 0 top
R65  1k  [0603-RES]  56.64,34.55 180 top
R66  200k  [0603-RES]  57.48,38.25 270 top
R67  10k  [0603-RES]  73.41,36.96 270 top
R68  1k  [0603-RES]  68.83,41.05 0 top
R69  1k  [0603-RES]  72.26,41.05 180 top
R70  1k  [0603-RES]  67.31,34.55 0 top
R71  1k  [0603-RES]  71.12,34.55 180 top
R72  200k  [0603-RES]  71.95,38.25 270 top
R73  10k  [0603-RES]  87.88,36.96 270 top
R74  1k  [0603-RES]  83.31,41.05 0 top
R75  1k  [0603-RES]  86.74,41.05 180 top
R76  1k  [0603-RES]  81.79,34.55 0 top
R77  1k  [0603-RES]  85.6,34.55 180 top
R78  200k  [0603-RES]  86.43,38.25 270 top
R79  10k  [0603-RES]  102.36,36.96 270 top
R80  1k  [0603-RES]  97.79,41.05 0 top
R81  1k  [0603-RES]  101.22,41.05 180 top
R82  1k  [0603-RES]  96.27,34.55 0 top
R83  1k  [0603-RES]  100.08,34.55 180 top
R84  200k  [0603-RES]  100.91,38.25 270 top
R85  10k  [0603-RES]  15.49,55.24 270 top
R86  1k  [0603-RES]  10.92,59.34 0 top
R87  1k  [0603-RES]  14.35,59.34 180 top
R88  1k  [0603-RES]  9.4,52.84 0 top
R89  1k  [0603-RES]  13.21,52.84 180 top
R90  200k  [0603-RES]  14.04,56.53 270 top
R91  10k  [0603-RES]  29.97,55.24 270 top
R92  1k  [0603-RES]  25.4,59.34 0 top
R93  1k  [0603-RES]  28.83,59.34 180 top
R94  1k  [0603-RES]  23.88,52.84 0 top
R95  1k  [0603-RES]  27.69,52.84 180 top
R96  200k  [0603-RES]  28.52,56.53 270 top
R97  10k  [0603-RES]  44.45,55.24 270 top
R98  1k  [0603-RES]  39.88,59.34 0 top
R99  1k  [0603-RES]  43.31,59.34 180 top
R100  1k  [0603-RES]  38.35,52.84 0 top
R101  1k  [0603-RES]  42.16,52.84 180 top
R102  200k  [0603-RES]  43,56.53 270 top
R103  10k  [0603-RES]  58.93,55.24 270 top
R104  1k  [0603-RES]  54.36,59.34 0 top
R105  1k  [0603-RES]  57.78,59.34 180 top
R106  1k  [0603-RES]  52.83,52.84 0 top
R107  1k  [0603-RES]  56.64,52.84 180 top
R108  200k  [0603-RES]  57.48,56.53 270 top
R109  10k  [0603-RES]  73.41,55.24 270 top
R110  1k  [0603-RES]  68.83,59.34 0 top
R111  1k  [0603-RES]  72.26,59.34 180 top
R112  1k  [0603-RES]  67.31,52.84 0 top
R113  1k  [0603-RES]  71.12,52.84 180 top
R114  200k  [0603-RES]  71.95,56.53 270 top
R115  10k  [0603-RES]  87.88,55.24 270 top
R116  1k  [0603-RES]  83.31,59.34 0 top
R117  1k  [0603-RES]  86.74,59.34 180 top
R118  1k  [0603-RES]  81.79,52.84 0 top
R119  1k  [0603-RES]  85.6,52.84 180 top
R120  200k  [0603-RES]  86.43,56.53 270 top
R121  10k  [0603-RES]  102.36,55.24 270 top
R122  1k  [0603-RES]  97.79,59.34 0 top
R123  1k  [0603-RES]  101.22,59.34 180 top
R124  1k  [0603-RES]  96.27,52.84 0 top
R125  1k  [0603-RES]  100.08,52.84 180 top
R126  200k  [0603-RES]  100.91,56.53 270 top
R127  10k  [0603-RES]  15.49,73.53 270 top
R128  1k  [0603-RES]  10.92,77.62 0 top
R129  1k  [0603-RES]  14.35,77.62 180 top
R130  1k  [0603-RES]  9.4,71.12 0 top
R131  1k  [0603-RES]  13.21,71.12 180 top
R132  200k  [0603-RES]  14.04,74.82 270 top
R133  10k  [0603-RES]  29.97,73.53 270 top
R134  1k  [0603-RES]  25.4,77.62 0 top
R135  1k  [0603-RES]  28.83,77.62 180 top
R136  1k  [0603-RES]  23.88,71.12 0 top
R137  1k  [0603-RES]  27.69,71.12 180 top
R138  200k  [0603-RES]  28.52,74.82 270 top
R139  10k  [0603-RES]  44.45,73.53 270 top
R140  1k  [0603-RES]  39.88,77.62 0 top
R141  1k  [0603-RES]  43.31,77.62 180 top
R142  1k  [0603-RES]  38.35,71.12 0 top
R143  1k  [0603-RES]  42.16,71.12 180 top
R144  200k  [0603-RES]  43,74.82 270 top
R145  10k  [0603-RES]  58.93,73.53 270 top
R146  1k  [0603-RES]  54.36,77.62 0 top
R147  1k  [0603-RES]  57.78,77.62 180 top
R148  1k  [0603-RES]  52.83,71.12 0 top
R149  1k  [0603-RES]  56.64,71.12 180 top
R150  200k  [0603-RES]  57.48,74.82 270 top
R151  10k  [0603-RES]  73.41,73.53 270 top
R152  1k  [0603-RES]  68.83,77.62 0 top
R153  1k  [0603-RES]  72.26,77.62 180 top
R154  1k  [0603-RES]  67.31,71.12 0 top
R155  1k  [0603-RES]  71.12,71.12 180 top
R156  200k  [0603-RES]  71.95,74.82 270 top
R157  10k  [0603-RES]  87.88,73.53 270 top
R158  1k  [0603-RES]  83.31,77.62 0 top
R159  1k  [0603-RES]  86.74,77.62 180 top
R160  1k  [0603-RES]  81.79,71.12 0 top
R161  1k  [0603-RES]  85.6,71.12 180 top
R162  200k  [0603-RES]  86.43,74.82 270 top
R163  10k  [0603-RES]  102.36,73.53 270 top
R164  1k  [0603-RES]  97.79,77.62 0 top
R165  1k  [0603-RES]  101.22,77.62 180 top
R166  1k  [0603-RES]  96.27,71.12 0 top
R167  1k  [0603-RES]  100.08,71.12 180 top
R168  200k  [0603-RES]  100.91,74.82 270 top
R169  10k  [0603-RES]  15.49,91.82 270 top
R170  1k  [0603-RES]  10.92,95.91 0 top
R171  1k  [0603-RES]  14.35,95.91 180 top
R172  1k  [0603-RES]  9.4,89.41 0 top
R173  1k  [0603-RES]  13.21,89.41 180 top
R174  200k  [0603-RES]  14.04,93.11 270 top
R175  10k  [0603-RES]  29.97,91.82 270 top
R176  1k  [0603-RES]  25.4,95.91 0 top
R177  1k  [0603-RES]  28.83,95.91 180 top
R178  1k  [0603-RES]  23.88,89.41 0 top
R179  1k  [0603-RES]  27.69,89.41 180 top
R180  200k  [0603-RES]  28.52,93.11 270 top
R181  10k  [0603-RES]  44.45,91.82 270 top
R182  1k  [0603-RES]  39.88,95.91 0 top
R183  1k  [0603-RES]  43.31,95.91 180 top
R184  1k  [0603-RES]  38.35,89.41 0 top
R185  1k  [0603-RES]  42.16,89.41 180 top
R186  200k  [0603-RES]  43,93.11 270 top
R187  10k  [0603-RES]  58.93,91.82 270 top
R188  1k  [0603-RES]  54.36,95.91 0 top
R189  1k  [0603-RES]  57.78,95.91 180 top
R190  1k  [0603-RES]  52.83,89.41 0 top
R191  1k  [0603-RES]  56.64,89.41 180 top
R192  200k  [0603-RES]  57.48,93.11 270 top
R193  10k  [0603-RES]  73.41,91.82 270 top
R194  1k  [0603-RES]  68.83,95.91 0 top
R195  1k  [0603-RES]  72.26,95.91 180 top
R196  1k  [0603-RES]  67.31,89.41 0 top
R197  1k  [0603-RES]  71.12,89.41 180 top
R198  200k  [0603-RES]  71.95,93.11 270 top
R199  10k  [0603-RES]  87.88,91.82 270 top
R200  1k  [0603-RES]  83.31,95.91 0 top
R201  1k  [0603-RES]  86.74,95.91 180 top
R202  1k  [0603-RES]  81.79,89.41 0 top
R203  1k  [0603-RES]  85.6,89.41 180 top
R204  200k  [0603-RES]  86.43,93.11 270 top
R205  10k  [0603-RES]  102.36,91.82 270 top
R206  1k  [0603-RES]  97.79,95.91 0 top
R207  1k  [0603-RES]  101.22,95.91 180 top
R208  1k  [0603-RES]  96.27,89.41 0 top
R209  1k  [0603-RES]  100.08,89.41 180 top
R210  200k  [0603-RES]  100.91,93.11 270 top
U1  MMA8452Q  [QFN-16_0.5MM]  18.29,19.56 270 top
U2  MIC5205-3.3V  [SOT23-5]  18.92,11.94 0 top
U3  PCA9306  [PSOP-8]  11.94,19.56 180 top
U4  PCA9306  [PSOP-8]  26.42,19.56 180 top
U5  MMA8452Q  [QFN-16_0.5MM]  32.77,19.56 270 top
U6  MIC5205-3.3V  [SOT23-5]  33.4,11.94 0 top
U7  PCA9306  [PSOP-8]  40.89,19.56 180 top
U8  MMA8452Q  [QFN-16_0.5MM]  47.24,19.56 270 top
U9  MIC5205-3.3V  [SOT23-5]  47.88,11.94 0 top
U10  PCA9306  [PSOP-8]  55.37,19.56 180 top
U11  MMA8452Q  [QFN-16_0.5MM]  61.72,19.56 270 top
U12  MIC5205-3.3V  [SOT23-5]  62.36,11.94 0 top
U13  PCA9306  [PSOP-8]  69.85,19.56 180 top
U14  MMA8452Q  [QFN-16_0.5MM]  76.2,19.56 270 top
U15  MIC5205-3.3V  [SOT23-5]  76.83,11.94 0 top
U16  PCA9306  [PSOP-8]  84.33,19.56 180 top
U17  MMA8452Q  [QFN-16_0.5MM]  90.68,19.56 270 top
U18  MIC5205-3.3V  [SOT23-5]  91.31,11.94 0 top
U19  PCA9306  [PSOP-8]  98.81,19.56 180 top
U20  MMA8452Q  [QFN-16_0.5MM]  105.16,19.56 270 top
U21  MIC5205-3.3V  [SOT23-5]  105.79,11.94 0 top
U22  PCA9306  [PSOP-8]  11.94,37.85 180 top
U23  MMA8452Q  [QFN-16_0.5MM]  18.29,37.85 270 top
U24  MIC5205-3.3V  [SOT23-5]  18.92,30.23 0 top
U25  PCA9306  [PSOP-8]  26.42,37.85 180 top
U26  MMA8452Q  [QFN-16_0.5MM]  32.77,37.85 270 top
U27  MIC5205-3.3V  [SOT23-5]  33.4,30.23 0 top
U28  PCA9306  [PSOP-8]  40.89,37.85 180 top
U29  MMA8452Q  [QFN-16_0.5MM]  47.24,37.85 270 top
U30  MIC5205-3.3V  [SOT23-5]  47.88,30.23 0 top
U31  PCA9306  [PSOP-8]  55.37,37.85 180 top
U32  MMA8452Q  [QFN-16_0.5MM]  61.72,37.85 270 top
U33  MIC5205-3.3V  [SOT23-5]  62.36,30.23 0 top
U34  PCA9306  [PSOP-8]  69.85,37.85 180 top
U35  MMA8452Q  [QFN-16_0.5MM]  76.2,37.85 270 top
U36  MIC5205-3.3V  [SOT23-5]  76.83,30.23 0 top
U37  PCA9306  [PSOP-8]  84.33,37.85 180 top
U38  MMA8452Q  [QFN-16_0.5MM]  90.68,37.85 270 top
U39  MIC5205-3.3V  [SOT23-5]  91.31,30.23 0 top
U40  PCA9306  [PSOP-8]  98.81,37.85 180 top
U41  MMA8452Q  [QFN-16_0.5MM]  105.16,37.85 270 top
U42  MIC5205-3.3V  [SOT23-5]  105.79,30.23 0 top
U43  PCA9306  [PSOP-8]  11.94,56.13 180 top
U44  MMA8452Q  [QFN-16_0.5MM]  18.29,56.13 270 top
U45  MIC5205-3.3V  [SOT23-5]  18.92,48.51 0 top
U46  PCA9306  [PSOP-8]  26.42,56.13 180 top
U47  MMA8452Q  [QFN-16_0.5MM]  32.77,56.13 270 top
U48  MIC5205-3.3V  [SOT23-5]  33.4,48.51 0 top
U49  PCA9306  [PSOP-8]  40.89,56.13 180 top
U50  MMA8452Q  [QFN-16_0.5MM]  47.24,56.13 270 top
U51  MIC5205-3.3V  [SOT23-5]  47.88,48.51 0 top
U52  PCA9306  [PSOP-8]  55.37,56.13 180 top
U53  MMA8452Q  [QFN-16_0.5MM]  61.72,56.13 270 top
U54  MIC5205-3.3V  [SOT23-5]  62.36,48.51 0 top
U55  PCA9306  [PSOP-8]  69.85,56.13 180 top
U56  MMA8452Q  [QFN-16_0.5MM]  76.2,56.13 270 top
U57  MIC5205-3.3V  [SOT23-5]  76.83,48.51 0 top
U58  PCA9306  [PSOP-8]  84.33,56.13 180 top
U59  MMA8452Q  [QFN-16_0.5MM]  90.68,56.13 270 top
U60  MIC5205-3.3V  [SOT23-5]  91.31,48.51 0 top
U61  PCA9306  [PSOP-8]  98.81,56.13 180 top
U62  MMA8452Q  [QFN-16_0.5MM]  105.16,56.13 270 top
U63  MIC5205-3.3V  [SOT23-5]  105.79,48.51 0 top
U64  PCA9306  [PSOP-8]  11.94,74.42 180 top
U65  MMA8452Q  [QFN-16_0.5MM]  18.29,74.42 270 top
U66  MIC5205-3.3V  [SOT23-5]  18.92,66.8 0 top
U67  PCA9306  [PSOP-8]  26.42,74.42 180 top
U68  MMA8452Q  [QFN-16_0.5MM]  32.77,74.42 270 top
U69  MIC5205-3.3V  [SOT23-5]  33.4,66.8 0 top
U70  PCA9306  [PSOP-8]  40.89,74.42 180 top
U71  MMA8452Q  [QFN-16_0.5MM]  47.24,74.42 270 top
U72  MIC5205-3.3V  [SOT23-5]  47.88,66.8 0 top
U73  PCA9306  [PSOP-8]  55.37,74.42 180 top
U74  MMA8452Q  [QFN-16_0.5MM]  61.72,74.42 270 top
U75  MIC5205-3.3V  [SOT23-5]  62.36,66.8 0 top
U76  PCA9306  [PSOP-8]  69.85,74.42 180 top
U77  MMA8452Q  [QFN-16_0.5MM]  76.2,74.42 270 top
U78  MIC5205-3.3V  [SOT23-5]  76.83,66.8 0 top
U79  PCA9306  [PSOP-8]  84.33,74.42 180 top
U80  MMA8452Q  [QFN-16_0.5MM]  90.68,74.42 270 top
U81  MIC5205-3.3V  [SOT23-5]  91.31,66.8 0 top
U82  PCA9306  [PSOP-8]  98.81,74.42 180 top
U83  MMA8452Q  [QFN-16_0.5MM]  105.16,74.42 270 top
U84  MIC5205-3.3V  [SOT23-5]  105.79,66.8 0 top
U85  PCA9306  [PSOP-8]  11.94,92.71 180 top
U86  MMA8452Q  [QFN-16_0.5MM]  18.29,92.71 270 top
U87  MIC5205-3.3V  [SOT23-5]  18.92,85.09 0 top
U88  PCA9306  [PSOP-8]  26.42,92.71 180 top
U89  MMA8452Q  [QFN-16_0.5MM]  32.77,92.71 270 top
U90  MIC5205-3.3V  [SOT23-5]  33.4,85.09 0 top
U91  PCA9306  [PSOP-8]  40.89,92.71 180 top
U92  MMA8452Q  [QFN-16_0.5MM]  47.24,92.71 270 top
U93  MIC5205-3.3V  [SOT23-5]  47.88,85.09 0 top
U94  PCA9306  [PSOP-8]  55.37,92.71 180 top
U95  MMA8452Q  [QFN-16_0.5MM]  61.72,92.71 270 top
U96  MIC5205-3.3V  [SOT23-5]  62.36,85.09 0 top
U97  PCA9306  [PSOP-8]  69.85,92.71 180 top
U98  MMA8452Q  [QFN-16_0.5MM]  76.2,92.71 270 top
U99  MIC5205-3.3V  [SOT23-5]  76.83,85.09 0 top
U100  PCA9306  [PSOP-8]  84.33,92.71 180 top
U101  MMA8452Q  [QFN-16_0.5MM]  90.68,92.71 270 top
U102  MIC5205-3.3V  [SOT23-5]  91.31,85.09 0 top
U103  PCA9306  [PSOP-8]  98.81,92.71 180 top
U104  MMA8452Q  [QFN-16_0.5MM]  105.16,92.71 270 top
U105  MIC5205-3.3V  [SOT23-5]  105.79,85.09 0 top

## Library data of the parts
C1 C3-C5 C7-C9 C11-C13 C15-C17 C19-C21 C23-C25 C27-C29 C31-C33 C35-C37 C39-C41 C43-C45 C47-C49 C51-C53 C55-C57 C59-C61 C63-C65 C67-C69 C71-C73 C75-C77 C79-C81 C83-C85 C87-C89 C91-C93 C95-C97 C99-C101 C103-C105 C107-C109 C111-C113 C115-C117 C119-C121 C123-C125 C127-C129 C131-C133 C135-C137 C139 C140 = SparkFun-Capacitors; PROD_ID: CAP-00810
C2 C6 C10 C14 C18 C22 C26 C30 C34 C38 C42 C46 C50 C54 C58 C62 C66 C70 C74 C78 C82 C86 C90 C94 C98 C102 C106 C110 C114 C118 C122 C126 C130 C134 C138 = SparkFun-Capacitors; PROD_ID: CAP-08280
E$1 E$4 E$5 FID1-FID70 LOGO1-LOGO70 = SparkFun-Aesthetics
JP1 JP3 JP5 JP7 JP9 JP11 JP13 JP15 JP17 JP19 JP21 JP23 JP25 JP27 JP29 JP31 JP33 JP35 JP37 JP39 JP41 JP43 JP45 JP47 JP49 JP51 JP53 JP55 JP57 JP59 JP61 JP63 JP65 JP67 JP69 = SparkFun-Connectors; PROD_ID: CONN-11415
JP2 JP4 JP6 JP8 JP10 JP12 JP14 JP16 JP18 JP20 JP22 JP24 JP26 JP28 JP30 JP32 JP34 JP36 JP38 JP40 JP42 JP44 JP46 JP48 JP50 JP52 JP54 JP56 JP58 JP60 JP62 JP64 JP66 JP68 JP70 = SparkFun-Connectors; PROD_ID: CONN-11290
R1 R7 R13 R19 R25 R31 R37 R43 R49 R55 R61 R67 R73 R79 R85 R91 R97 R103 R109 R115 R121 R127 R133 R139 R145 R151 R157 R163 R169 R175 R181 R187 R193 R199 R205 = SparkFun-Resistors; PROD_ID: RES-00824
R2-R5 R8-R11 R14-R17 R20-R23 R26-R29 R32-R35 R38-R41 R44-R47 R50-R53 R56-R59 R62-R65 R68-R71 R74-R77 R80-R83 R86-R89 R92-R95 R98-R101 R104-R107 R110-R113 R116-R119 R122-R125 R128-R131 R134-R137 R140-R143 R146-R149 R152-R155 R158-R161 R164-R167 R170-R173 R176-R179 R182-R185 R188-R191 R194-R197 R200-R203 R206-R209 = SparkFun-Resistors; PROD_ID: RES-07856
R6 R12 R18 R24 R30 R36 R42 R48 R54 R60 R66 R72 R78 R84 R90 R96 R102 R108 R114 R120 R126 R132 R138 R144 R150 R156 R162 R168 R174 R180 R186 R192 R198 R204 R210 = SparkFun-Resistors; PROD_ID: RES-09385
U1 U5 U8 U11 U14 U17 U20 U23 U26 U29 U32 U35 U38 U41 U44 U47 U50 U53 U56 U59 U62 U65 U68 U71 U74 U77 U80 U83 U86 U89 U92 U95 U98 U101 U104 = SparkFun-Sensors; PROD_ID: IC-10769
U2 U6 U9 U12 U15 U18 U21 U24 U27 U30 U33 U36 U39 U42 U45 U48 U51 U54 U57 U60 U63 U66 U69 U72 U75 U78 U81 U84 U87 U90 U93 U96 U99 U102 U105 = SparkFun-PowerIC; PROD_ID: VREG-00822
U3 U4 U7 U10 U13 U16 U19 U22 U25 U28 U31 U34 U37 U40 U43 U46 U49 U52 U55 U58 U61 U64 U67 U70 U73 U76 U79 U82 U85 U88 U91 U94 U97 U100 U103 = SparkFun-DigitalIC; PROD_ID: IC-10023

## Nets
3.3V: C1.1 C2.1 R1.2 R2.2 R3.2 U1.1 U1.14 U2.5 U3.1
3.3V1: C5.1 C6.1 R7.2 R8.2 R9.2 U4.1 U5.1 U5.14 U6.5
3.3V2: C9.1 C10.1 R13.2 R14.2 R15.2 U7.1 U8.1 U8.14 U9.5
3.3V3: C13.1 C14.1 R19.2 R20.2 R21.2 U10.1 U11.1 U11.14 U12.5
3.3V4: C17.1 C18.1 R25.2 R26.2 R27.2 U13.1 U14.1 U14.14 U15.5
3.3V5: C21.1 C22.1 R31.2 R32.2 R33.2 U16.1 U17.1 U17.14 U18.5
3.3V6: C25.1 C26.1 R37.2 R38.2 R39.2 U19.1 U20.1 U20.14 U21.5
3.3V7: C29.1 C30.1 R43.2 R44.2 R45.2 U22.1 U23.1 U23.14 U24.5
3.3V8: C33.1 C34.1 R49.2 R50.2 R51.2 U25.1 U26.1 U26.14 U27.5
3.3V9: C37.1 C38.1 R55.2 R56.2 R57.2 U28.1 U29.1 U29.14 U30.5
3.3V10: C41.1 C42.1 R61.2 R62.2 R63.2 U31.1 U32.1 U32.14 U33.5
3.3V11: C45.1 C46.1 R67.2 R68.2 R69.2 U34.1 U35.1 U35.14 U36.5
3.3V12: C49.1 C50.1 R73.2 R74.2 R75.2 U37.1 U38.1 U38.14 U39.5
3.3V13: C53.1 C54.1 R79.2 R80.2 R81.2 U40.1 U41.1 U41.14 U42.5
3.3V14: C57.1 C58.1 R85.2 R86.2 R87.2 U43.1 U44.1 U44.14 U45.5
3.3V15: C61.1 C62.1 R91.2 R92.2 R93.2 U46.1 U47.1 U47.14 U48.5
3.3V16: C65.1 C66.1 R97.2 R98.2 R99.2 U49.1 U50.1 U50.14 U51.5
3.3V17: C69.1 C70.1 R103.2 R104.2 R105.2 U52.1 U53.1 U53.14 U54.5
3.3V18: C73.1 C74.1 R109.2 R110.2 R111.2 U55.1 U56.1 U56.14 U57.5
3.3V19: C77.1 C78.1 R115.2 R116.2 R117.2 U58.1 U59.1 U59.14 U60.5
3.3V20: C81.1 C82.1 R121.2 R122.2 R123.2 U61.1 U62.1 U62.14 U63.5
3.3V21: C85.1 C86.1 R127.2 R128.2 R129.2 U64.1 U65.1 U65.14 U66.5
3.3V22: C89.1 C90.1 R133.2 R134.2 R135.2 U67.1 U68.1 U68.14 U69.5
3.3V23: C93.1 C94.1 R139.2 R140.2 R141.2 U70.1 U71.1 U71.14 U72.5
3.3V24: C97.1 C98.1 R145.2 R146.2 R147.2 U73.1 U74.1 U74.14 U75.5
3.3V25: C101.1 C102.1 R151.2 R152.2 R153.2 U76.1 U77.1 U77.14 U78.5
3.3V26: C105.1 C106.1 R157.2 R158.2 R159.2 U79.1 U80.1 U80.14 U81.5
3.3V27: C109.1 C110.1 R163.2 R164.2 R165.2 U82.1 U83.1 U83.14 U84.5
3.3V28: C113.1 C114.1 R169.2 R170.2 R171.2 U85.1 U86.1 U86.14 U87.5
3.3V29: C117.1 C118.1 R175.2 R176.2 R177.2 U88.1 U89.1 U89.14 U90.5
3.3V30: C121.1 C122.1 R181.2 R182.2 R183.2 U91.1 U92.1 U92.14 U93.5
3.3V31: C125.1 C126.1 R187.2 R188.2 R189.2 U94.1 U95.1 U95.14 U96.5
3.3V32: C129.1 C130.1 R193.2 R194.2 R195.2 U97.1 U98.1 U98.14 U99.5
3.3V33: C133.1 C134.1 R199.2 R200.2 R201.2 U100.1 U101.1 U101.14 U102.5
3.3V34: C137.1 C138.1 R205.2 R206.2 R207.2 U103.1 U104.1 U104.14 U105.5
5V: JP1.3 JP1.4 JP2.3 JP2.4 R4.2 R5.2 R6.2 U2.1 U2.3
5V1: JP3.3 JP3.4 JP4.3 JP4.4 R10.2 R11.2 R12.2 U6.1 U6.3
5V2: JP5.3 JP5.4 JP6.3 JP6.4 R16.2 R17.2 R18.2 U9.1 U9.3
5V3: JP7.3 JP7.4 JP8.3 JP8.4 R22.2 R23.2 R24.2 U12.1 U12.3
5V4: JP9.3 JP9.4 JP10.3 JP10.4 R28.2 R29.2 R30.2 U15.1 U15.3
5V5: JP11.3 JP11.4 JP12.3 JP12.4 R34.2 R35.2 R36.2 U18.1 U18.3
5V6: JP13.3 JP13.4 JP14.3 JP14.4 R40.2 R41.2 R42.2 U21.1 U21.3
5V7: JP15.3 JP15.4 JP16.3 JP16.4 R46.2 R47.2 R48.2 U24.1 U24.3
5V8: JP17.3 JP17.4 JP18.3 JP18.4 R52.2 R53.2 R54.2 U27.1 U27.3
5V9: JP19.3 JP19.4 JP20.3 JP20.4 R58.2 R59.2 R60.2 U30.1 U30.3
5V10: JP21.3 JP21.4 JP22.3 JP22.4 R64.2 R65.2 R66.2 U33.1 U33.3
5V11: JP23.3 JP23.4 JP24.3 JP24.4 R70.2 R71.2 R72.2 U36.1 U36.3
5V12: JP25.3 JP25.4 JP26.3 JP26.4 R76.2 R77.2 R78.2 U39.1 U39.3
5V13: JP27.3 JP27.4 JP28.3 JP28.4 R82.2 R83.2 R84.2 U42.1 U42.3
5V14: JP29.3 JP29.4 JP30.3 JP30.4 R88.2 R89.2 R90.2 U45.1 U45.3
5V15: JP31.3 JP31.4 JP32.3 JP32.4 R94.2 R95.2 R96.2 U48.1 U48.3
5V16: JP33.3 JP33.4 JP34.3 JP34.4 R100.2 R101.2 R102.2 U51.1 U51.3
5V17: JP35.3 JP35.4 JP36.3 JP36.4 R106.2 R107.2 R108.2 U54.1 U54.3
5V18: JP37.3 JP37.4 JP38.3 JP38.4 R112.2 R113.2 R114.2 U57.1 U57.3
5V19: JP39.3 JP39.4 JP40.3 JP40.4 R118.2 R119.2 R120.2 U60.1 U60.3
5V20: JP41.3 JP41.4 JP42.3 JP42.4 R124.2 R125.2 R126.2 U63.1 U63.3
5V21: JP43.3 JP43.4 JP44.3 JP44.4 R130.2 R131.2 R132.2 U66.1 U66.3
5V22: JP45.3 JP45.4 JP46.3 JP46.4 R136.2 R137.2 R138.2 U69.1 U69.3
5V23: JP47.3 JP47.4 JP48.3 JP48.4 R142.2 R143.2 R144.2 U72.1 U72.3
5V24: JP49.3 JP49.4 JP50.3 JP50.4 R148.2 R149.2 R150.2 U75.1 U75.3
5V25: JP51.3 JP51.4 JP52.3 JP52.4 R154.2 R155.2 R156.2 U78.1 U78.3
5V26: JP53.3 JP53.4 JP54.3 JP54.4 R160.2 R161.2 R162.2 U81.1 U81.3
5V27: JP55.3 JP55.4 JP56.3 JP56.4 R166.2 R167.2 R168.2 U84.1 U84.3
5V28: JP57.3 JP57.4 JP58.3 JP58.4 R172.2 R173.2 R174.2 U87.1 U87.3
5V29: JP59.3 JP59.4 JP60.3 JP60.4 R178.2 R179.2 R180.2 U90.1 U90.3
5V30: JP61.3 JP61.4 JP62.3 JP62.4 R184.2 R185.2 R186.2 U93.1 U93.3
5V31: JP63.3 JP63.4 JP64.3 JP64.4 R190.2 R191.2 R192.2 U96.1 U96.3
5V32: JP65.3 JP65.4 JP66.3 JP66.4 R196.2 R197.2 R198.2 U99.1 U99.3
5V33: JP67.3 JP67.4 JP68.3 JP68.4 R202.2 R203.2 R204.2 U102.1 U102.3
5V34: JP69.3 JP69.4 JP70.3 JP70.4 R208.2 R209.2 R210.2 U105.1 U105.3
ADDR: R1.1 U1.7
ADDR1: R7.1 U5.7
ADDR2: R13.1 U8.7
ADDR3: R19.1 U11.7
ADDR4: R25.1 U14.7
ADDR5: R31.1 U17.7
ADDR6: R37.1 U20.7
ADDR7: R43.1 U23.7
ADDR8: R49.1 U26.7
ADDR9: R55.1 U29.7
ADDR10: R61.1 U32.7
ADDR11: R67.1 U35.7
ADDR12: R73.1 U38.7
ADDR13: R79.1 U41.7
ADDR14: R85.1 U44.7
ADDR15: R91.1 U47.7
ADDR16: R97.1 U50.7
ADDR17: R103.1 U53.7
ADDR18: R109.1 U56.7
ADDR19: R115.1 U59.7
ADDR20: R121.1 U62.7
ADDR21: R127.1 U65.7
ADDR22: R133.1 U68.7
ADDR23: R139.1 U71.7
ADDR24: R145.1 U74.7
ADDR25: R151.1 U77.7
ADDR26: R157.1 U80.7
ADDR27: R163.1 U83.7
ADDR28: R169.1 U86.7
ADDR29: R175.1 U89.7
ADDR30: R181.1 U92.7
ADDR31: R187.1 U95.7
ADDR32: R193.1 U98.7
ADDR33: R199.1 U101.7
ADDR34: R205.1 U104.7
GND: C1.2 C2.2 C3.2 C4.2 JP1.5 JP1.6 JP2.5 JP2.6 U1.5 U1.10 U1.12 U2.2 U3.4
GND1: C5.2 C6.2 C7.2 C8.2 JP3.5 JP3.6 JP4.5 JP4.6 U4.4 U5.5 U5.10 U5.12 U6.2
GND2: C9.2 C10.2 C11.2 C12.2 JP5.5 JP5.6 JP6.5 JP6.6 U7.4 U8.5 U8.10 U8.12 U9.2
GND3: C13.2 C14.2 C15.2 C16.2 JP7.5 JP7.6 JP8.5 JP8.6 U10.4 U11.5 U11.10 U11.12 U12.2
GND4: C17.2 C18.2 C19.2 C20.2 JP9.5 JP9.6 JP10.5 JP10.6 U13.4 U14.5 U14.10 U14.12 U15.2
GND5: C21.2 C22.2 C23.2 C24.2 JP11.5 JP11.6 JP12.5 JP12.6 U16.4 U17.5 U17.10 U17.12 U18.2
GND6: C25.2 C26.2 C27.2 C28.2 JP13.5 JP13.6 JP14.5 JP14.6 U19.4 U20.5 U20.10 U20.12 U21.2
GND7: C29.2 C30.2 C31.2 C32.2 JP15.5 JP15.6 JP16.5 JP16.6 U22.4 U23.5 U23.10 U23.12 U24.2
GND8: C33.2 C34.2 C35.2 C36.2 JP17.5 JP17.6 JP18.5 JP18.6 U25.4 U26.5 U26.10 U26.12 U27.2
GND9: C37.2 C38.2 C39.2 C40.2 JP19.5 JP19.6 JP20.5 JP20.6 U28.4 U29.5 U29.10 U29.12 U30.2
GND10: C41.2 C42.2 C43.2 C44.2 JP21.5 JP21.6 JP22.5 JP22.6 U31.4 U32.5 U32.10 U32.12 U33.2
GND11: C45.2 C46.2 C47.2 C48.2 JP23.5 JP23.6 JP24.5 JP24.6 U34.4 U35.5 U35.10 U35.12 U36.2
GND12: C49.2 C50.2 C51.2 C52.2 JP25.5 JP25.6 JP26.5 JP26.6 U37.4 U38.5 U38.10 U38.12 U39.2
GND13: C53.2 C54.2 C55.2 C56.2 JP27.5 JP27.6 JP28.5 JP28.6 U40.4 U41.5 U41.10 U41.12 U42.2
GND14: C57.2 C58.2 C59.2 C60.2 JP29.5 JP29.6 JP30.5 JP30.6 U43.4 U44.5 U44.10 U44.12 U45.2
GND15: C61.2 C62.2 C63.2 C64.2 JP31.5 JP31.6 JP32.5 JP32.6 U46.4 U47.5 U47.10 U47.12 U48.2
GND16: C65.2 C66.2 C67.2 C68.2 JP33.5 JP33.6 JP34.5 JP34.6 U49.4 U50.5 U50.10 U50.12 U51.2
GND17: C69.2 C70.2 C71.2 C72.2 JP35.5 JP35.6 JP36.5 JP36.6 U52.4 U53.5 U53.10 U53.12 U54.2
GND18: C73.2 C74.2 C75.2 C76.2 JP37.5 JP37.6 JP38.5 JP38.6 U55.4 U56.5 U56.10 U56.12 U57.2
GND19: C77.2 C78.2 C79.2 C80.2 JP39.5 JP39.6 JP40.5 JP40.6 U58.4 U59.5 U59.10 U59.12 U60.2
GND20: C81.2 C82.2 C83.2 C84.2 JP41.5 JP41.6 JP42.5 JP42.6 U61.4 U62.5 U62.10 U62.12 U63.2
GND21: C85.2 C86.2 C87.2 C88.2 JP43.5 JP43.6 JP44.5 JP44.6 U64.4 U65.5 U65.10 U65.12 U66.2
GND22: C89.2 C90.2 C91.2 C92.2 JP45.5 JP45.6 JP46.5 JP46.6 U67.4 U68.5 U68.10 U68.12 U69.2
GND23: C93.2 C94.2 C95.2 C96.2 JP47.5 JP47.6 JP48.5 JP48.6 U70.4 U71.5 U71.10 U71.12 U72.2
GND24: C97.2 C98.2 C99.2 C100.2 JP49.5 JP49.6 JP50.5 JP50.6 U73.4 U74.5 U74.10 U74.12 U75.2
GND25: C101.2 C102.2 C103.2 C104.2 JP51.5 JP51.6 JP52.5 JP52.6 U76.4 U77.5 U77.10 U77.12 U78.2
GND26: C105.2 C106.2 C107.2 C108.2 JP53.5 JP53.6 JP54.5 JP54.6 U79.4 U80.5 U80.10 U80.12 U81.2
GND27: C109.2 C110.2 C111.2 C112.2 JP55.5 JP55.6 JP56.5 JP56.6 U82.4 U83.5 U83.10 U83.12 U84.2
GND28: C113.2 C114.2 C115.2 C116.2 JP57.5 JP57.6 JP58.5 JP58.6 U85.4 U86.5 U86.10 U86.12 U87.2
GND29: C117.2 C118.2 C119.2 C120.2 JP59.5 JP59.6 JP60.5 JP60.6 U88.4 U89.5 U89.10 U89.12 U90.2
GND30: C121.2 C122.2 C123.2 C124.2 JP61.5 JP61.6 JP62.5 JP62.6 U91.4 U92.5 U92.10 U92.12 U93.2
GND31: C125.2 C126.2 C127.2 C128.2 JP63.5 JP63.6 JP64.5 JP64.6 U94.4 U95.5 U95.10 U95.12 U96.2
GND32: C129.2 C130.2 C131.2 C132.2 JP65.5 JP65.6 JP66.5 JP66.6 U97.4 U98.5 U98.10 U98.12 U99.2
GND33: C133.2 C134.2 C135.2 C136.2 JP67.5 JP67.6 JP68.5 JP68.6 U100.4 U101.5 U101.10 U101.12 U102.2
GND34: C137.2 C138.2 C139.2 C140.2 JP69.5 JP69.6 JP70.5 JP70.6 U103.4 U104.5 U104.10 U104.12 U105.2
N$1: C3.1 U1.2
N$2: C4.1 R6.1 U3.7 U3.8
N$3: C8.1 R12.1 U4.7 U4.8
N$4: C7.1 U5.2
N$5: C12.1 R18.1 U7.7 U7.8
N$6: C11.1 U8.2
N$7: C16.1 R24.1 U10.7 U10.8
N$8: C15.1 U11.2
N$9: C20.1 R30.1 U13.7 U13.8
N$10: C19.1 U14.2
N$11: C24.1 R36.1 U16.7 U16.8
N$12: C23.1 U17.2
N$13: C28.1 R42.1 U19.7 U19.8
N$14: C27.1 U20.2
N$15: C32.1 R48.1 U22.7 U22.8
N$16: C31.1 U23.2
N$17: C36.1 R54.1 U25.7 U25.8
N$18: C35.1 U26.2
N$19: C40.1 R60.1 U28.7 U28.8
N$20: C39.1 U29.2
N$21: C44.1 R66.1 U31.7 U31.8
N$22: C43.1 U32.2
N$23: C48.1 R72.1 U34.7 U34.8
N$24: C47.1 U35.2
N$25: C52.1 R78.1 U37.7 U37.8
N$26: C51.1 U38.2
N$27: C56.1 R84.1 U40.7 U40.8
N$28: C55.1 U41.2
N$29: C60.1 R90.1 U43.7 U43.8
N$30: C59.1 U44.2
N$31: C64.1 R96.1 U46.7 U46.8
N$32: C63.1 U47.2
N$33: C68.1 R102.1 U49.7 U49.8
N$34: C67.1 U50.2
N$35: C72.1 R108.1 U52.7 U52.8
N$36: C71.1 U53.2
N$37: C76.1 R114.1 U55.7 U55.8
N$38: C75.1 U56.2
N$39: C80.1 R120.1 U58.7 U58.8
N$40: C79.1 U59.2
N$41: C84.1 R126.1 U61.7 U61.8
N$42: C83.1 U62.2
N$43: C88.1 R132.1 U64.7 U64.8
N$44: C87.1 U65.2
N$45: C92.1 R138.1 U67.7 U67.8
N$46: C91.1 U68.2
N$47: C96.1 R144.1 U70.7 U70.8
N$48: C95.1 U71.2
N$49: C100.1 R150.1 U73.7 U73.8
N$50: C99.1 U74.2
N$51: C104.1 R156.1 U76.7 U76.8
N$52: C103.1 U77.2
N$53: C108.1 R162.1 U79.7 U79.8
N$54: C107.1 U80.2
N$55: C112.1 R168.1 U82.7 U82.8
N$56: C111.1 U83.2
N$57: C116.1 R174.1 U85.7 U85.8
N$58: C115.1 U86.2
N$59: C120.1 R180.1 U88.7 U88.8
N$60: C119.1 U89.2
N$61: C124.1 R186.1 U91.7 U91.8
N$62: C123.1 U92.2
N$63: C128.1 R192.1 U94.7 U94.8
N$64: C127.1 U95.2
N$65: C132.1 R198.1 U97.7 U97.8
N$66: C131.1 U98.2
N$67: C136.1 R204.1 U100.7 U100.8
N$68: C135.1 U101.2
N$69: C140.1 R210.1 U103.7 U103.8
N$70: C139.1 U104.2
SCL: JP1.2 JP2.1 R5.1 U3.6
SCL1: R3.1 U1.4 U3.2
SCL2: JP3.2 JP4.1 R11.1 U4.6
SCL3: R9.1 U4.2 U5.4
SCL4: JP5.2 JP6.1 R17.1 U7.6
SCL5: R15.1 U7.2 U8.4
SCL6: JP7.2 JP8.1 R23.1 U10.6
SCL7: R21.1 U10.2 U11.4
SCL8: JP9.2 JP10.1 R29.1 U13.6
SCL9: R27.1 U13.2 U14.4
SCL10: JP11.2 JP12.1 R35.1 U16.6
SCL11: R33.1 U16.2 U17.4
SCL12: JP13.2 JP14.1 R41.1 U19.6
SCL13: R39.1 U19.2 U20.4
SCL14: JP15.2 JP16.1 R47.1 U22.6
SCL15: R45.1 U22.2 U23.4
SCL16: JP17.2 JP18.1 R53.1 U25.6
SCL17: R51.1 U25.2 U26.4
SCL18: JP19.2 JP20.1 R59.1 U28.6
SCL19: R57.1 U28.2 U29.4
SCL20: JP21.2 JP22.1 R65.1 U31.6
SCL21: R63.1 U31.2 U32.4
SCL22: JP23.2 JP24.1 R71.1 U34.6
SCL23: R69.1 U34.2 U35.4
SCL24: JP25.2 JP26.1 R77.1 U37.6
SCL25: R75.1 U37.2 U38.4
SCL26: JP27.2 JP28.1 R83.1 U40.6
SCL27: R81.1 U40.2 U41.4
SCL28: JP29.2 JP30.1 R89.1 U43.6
SCL29: R87.1 U43.2 U44.4
SCL30: JP31.2 JP32.1 R95.1 U46.6
SCL31: R93.1 U46.2 U47.4
SCL32: JP33.2 JP34.1 R101.1 U49.6
SCL33: R99.1 U49.2 U50.4
SCL34: JP35.2 JP36.1 R107.1 U52.6
SCL35: R105.1 U52.2 U53.4
SCL36: JP37.2 JP38.1 R113.1 U55.6
SCL37: R111.1 U55.2 U56.4
SCL38: JP39.2 JP40.1 R119.1 U58.6
SCL39: R117.1 U58.2 U59.4
SCL40: JP41.2 JP42.1 R125.1 U61.6
SCL41: R123.1 U61.2 U62.4
SCL42: JP43.2 JP44.1 R131.1 U64.6
SCL43: R129.1 U64.2 U65.4
SCL44: JP45.2 JP46.1 R137.1 U67.6
SCL45: R135.1 U67.2 U68.4
SCL46: JP47.2 JP48.1 R143.1 U70.6
SCL47: R141.1 U70.2 U71.4
SCL48: JP49.2 JP50.1 R149.1 U73.6
SCL49: R147.1 U73.2 U74.4
SCL50: JP51.2 JP52.1 R155.1 U76.6
SCL51: R153.1 U76.2 U77.4
SCL52: JP53.2 JP54.1 R161.1 U79.6
SCL53: R159.1 U79.2 U80.4
SCL54: JP55.2 JP56.1 R167.1 U82.6
SCL55: R165.1 U82.2 U83.4
SCL56: JP57.2 JP58.1 R173.1 U85.6
SCL57: R171.1 U85.2 U86.4
SCL58: JP59.2 JP60.1 R179.1 U88.6
SCL59: R177.1 U88.2 U89.4
SCL60: JP61.2 JP62.1 R185.1 U91.6
SCL61: R183.1 U91.2 U92.4
SCL62: JP63.2 JP64.1 R191.1 U94.6
SCL63: R189.1 U94.2 U95.4
SCL64: JP65.2 JP66.1 R197.1 U97.6
SCL65: R195.1 U97.2 U98.4
SCL66: JP67.2 JP68.1 R203.1 U100.6
SCL67: R201.1 U100.2 U101.4
SCL68: JP69.2 JP70.1 R209.1 U103.6
SCL69: R207.1 U103.2 U104.4
SDA: JP1.1 JP2.2 R4.1 U3.5
SDA1: R2.1 U1.6 U3.3
SDA2: JP3.1 JP4.2 R10.1 U4.5
SDA3: R8.1 U4.3 U5.6
SDA4: JP5.1 JP6.2 R16.1 U7.5
SDA5: R14.1 U7.3 U8.6
SDA6: JP7.1 JP8.2 R22.1 U10.5
SDA7: R20.1 U10.3 U11.6
SDA8: JP9.1 JP10.2 R28.1 U13.5
SDA9: R26.1 U13.3 U14.6
SDA10: JP11.1 JP12.2 R34.1 U16.5
SDA11: R32.1 U16.3 U17.6
SDA12: JP13.1 JP14.2 R40.1 U19.5
SDA13: R38.1 U19.3 U20.6
SDA14: JP15.1 JP16.2 R46.1 U22.5
SDA15: R44.1 U22.3 U23.6
SDA16: JP17.1 JP18.2 R52.1 U25.5
SDA17: R50.1 U25.3 U26.6
SDA18: JP19.1 JP20.2 R58.1 U28.5
SDA19: R56.1 U28.3 U29.6
SDA20: JP21.1 JP22.2 R64.1 U31.5
SDA21: R62.1 U31.3 U32.6
SDA22: JP23.1 JP24.2 R70.1 U34.5
SDA23: R68.1 U34.3 U35.6
SDA24: JP25.1 JP26.2 R76.1 U37.5
SDA25: R74.1 U37.3 U38.6
SDA26: JP27.1 JP28.2 R82.1 U40.5
SDA27: R80.1 U40.3 U41.6
SDA28: JP29.1 JP30.2 R88.1 U43.5
SDA29: R86.1 U43.3 U44.6
SDA30: JP31.1 JP32.2 R94.1 U46.5
SDA31: R92.1 U46.3 U47.6
SDA32: JP33.1 JP34.2 R100.1 U49.5
SDA33: R98.1 U49.3 U50.6
SDA34: JP35.1 JP36.2 R106.1 U52.5
SDA35: R104.1 U52.3 U53.6
SDA36: JP37.1 JP38.2 R112.1 U55.5
SDA37: R110.1 U55.3 U56.6
SDA38: JP39.1 JP40.2 R118.1 U58.5
SDA39: R116.1 U58.3 U59.6
SDA40: JP41.1 JP42.2 R124.1 U61.5
SDA41: R122.1 U61.3 U62.6
SDA42: JP43.1 JP44.2 R130.1 U64.5
SDA43: R128.1 U64.3 U65.6
SDA44: JP45.1 JP46.2 R136.1 U67.5
SDA45: R134.1 U67.3 U68.6
SDA46: JP47.1 JP48.2 R142.1 U70.5
SDA47: R140.1 U70.3 U71.6
SDA48: JP49.1 JP50.2 R148.1 U73.5
SDA49: R146.1 U73.3 U74.6
SDA50: JP51.1 JP52.2 R154.1 U76.5
SDA51: R152.1 U76.3 U77.6
SDA52: JP53.1 JP54.2 R160.1 U79.5
SDA53: R158.1 U79.3 U80.6
SDA54: JP55.1 JP56.2 R166.1 U82.5
SDA55: R164.1 U82.3 U83.6
SDA56: JP57.1 JP58.2 R172.1 U85.5
SDA57: R170.1 U85.3 U86.6
SDA58: JP59.1 JP60.2 R178.1 U88.5
SDA59: R176.1 U88.3 U89.6
SDA60: JP61.1 JP62.2 R184.1 U91.5
SDA61: R182.1 U91.3 U92.6
SDA62: JP63.1 JP64.2 R190.1 U94.5
SDA63: R188.1 U94.3 U95.6
SDA64: JP65.1 JP66.2 R196.1 U97.5
SDA65: R194.1 U97.3 U98.6
SDA66: JP67.1 JP68.2 R202.1 U100.5
SDA67: R200.1 U100.3 U101.6
SDA68: JP69.1 JP70.2 R208.1 U103.5
SDA69: R206.1 U103.3 U104.6

## Tracks (layer width: path | path; a pad name or v marks a point on that pad's centre or on a via)
3.3V  (via drill 0.38)
  Top 0.203: U2.5 17.97,14.16 18.07,14.26 C2.1 C1.1 v16.76,16.38 15.86,16.38 15.49,16.75 R1.2 | R3.2 R2.2 11.77,23.64 11.56,23.86 7.86,23.86 7.36,23.36 7.36,19.96 7.46,19.86 v8.61,19.86 | U1.1 19.29,21.7 19.43,21.84 19.94,21.84 | 19.94,21.84 20.19,21.84 20.32,21.72 20.32,19.18 20.2,19.06 U1.14 | v19.94,22.86 19.94,21.84 | v11.86,19.86 12.01,19.86 12.67,20.52 U3.1